# EAGLE board electrosteel2020_9 (EAGLE 9.2.2), part 1 of 4
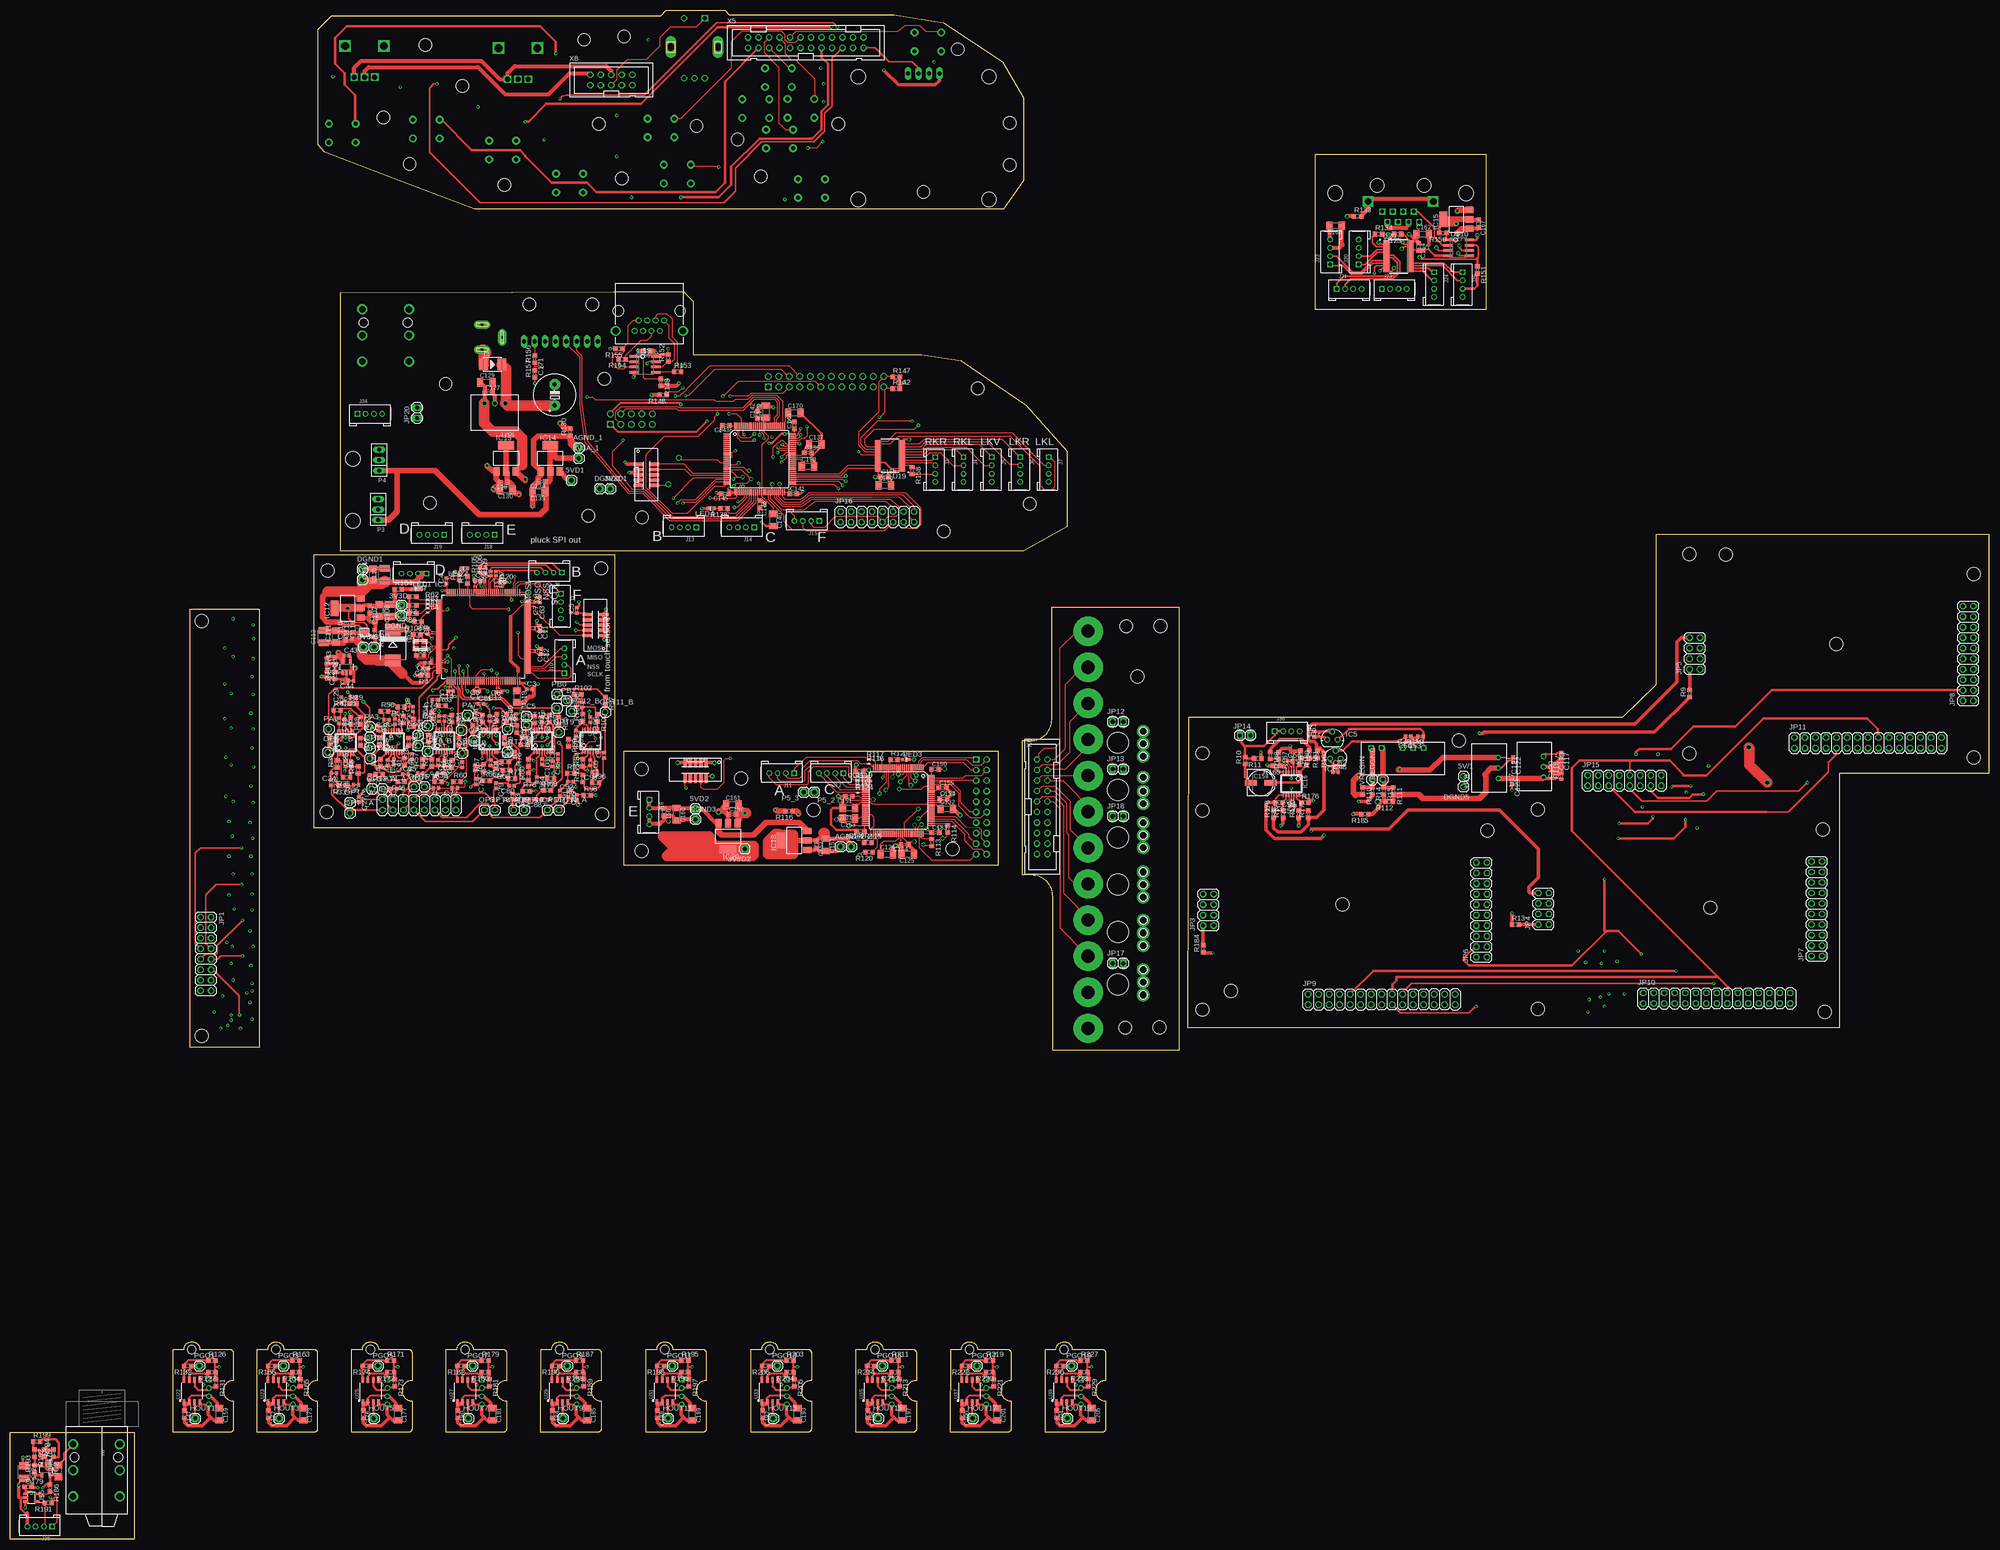
[diagram p0: board, top side]
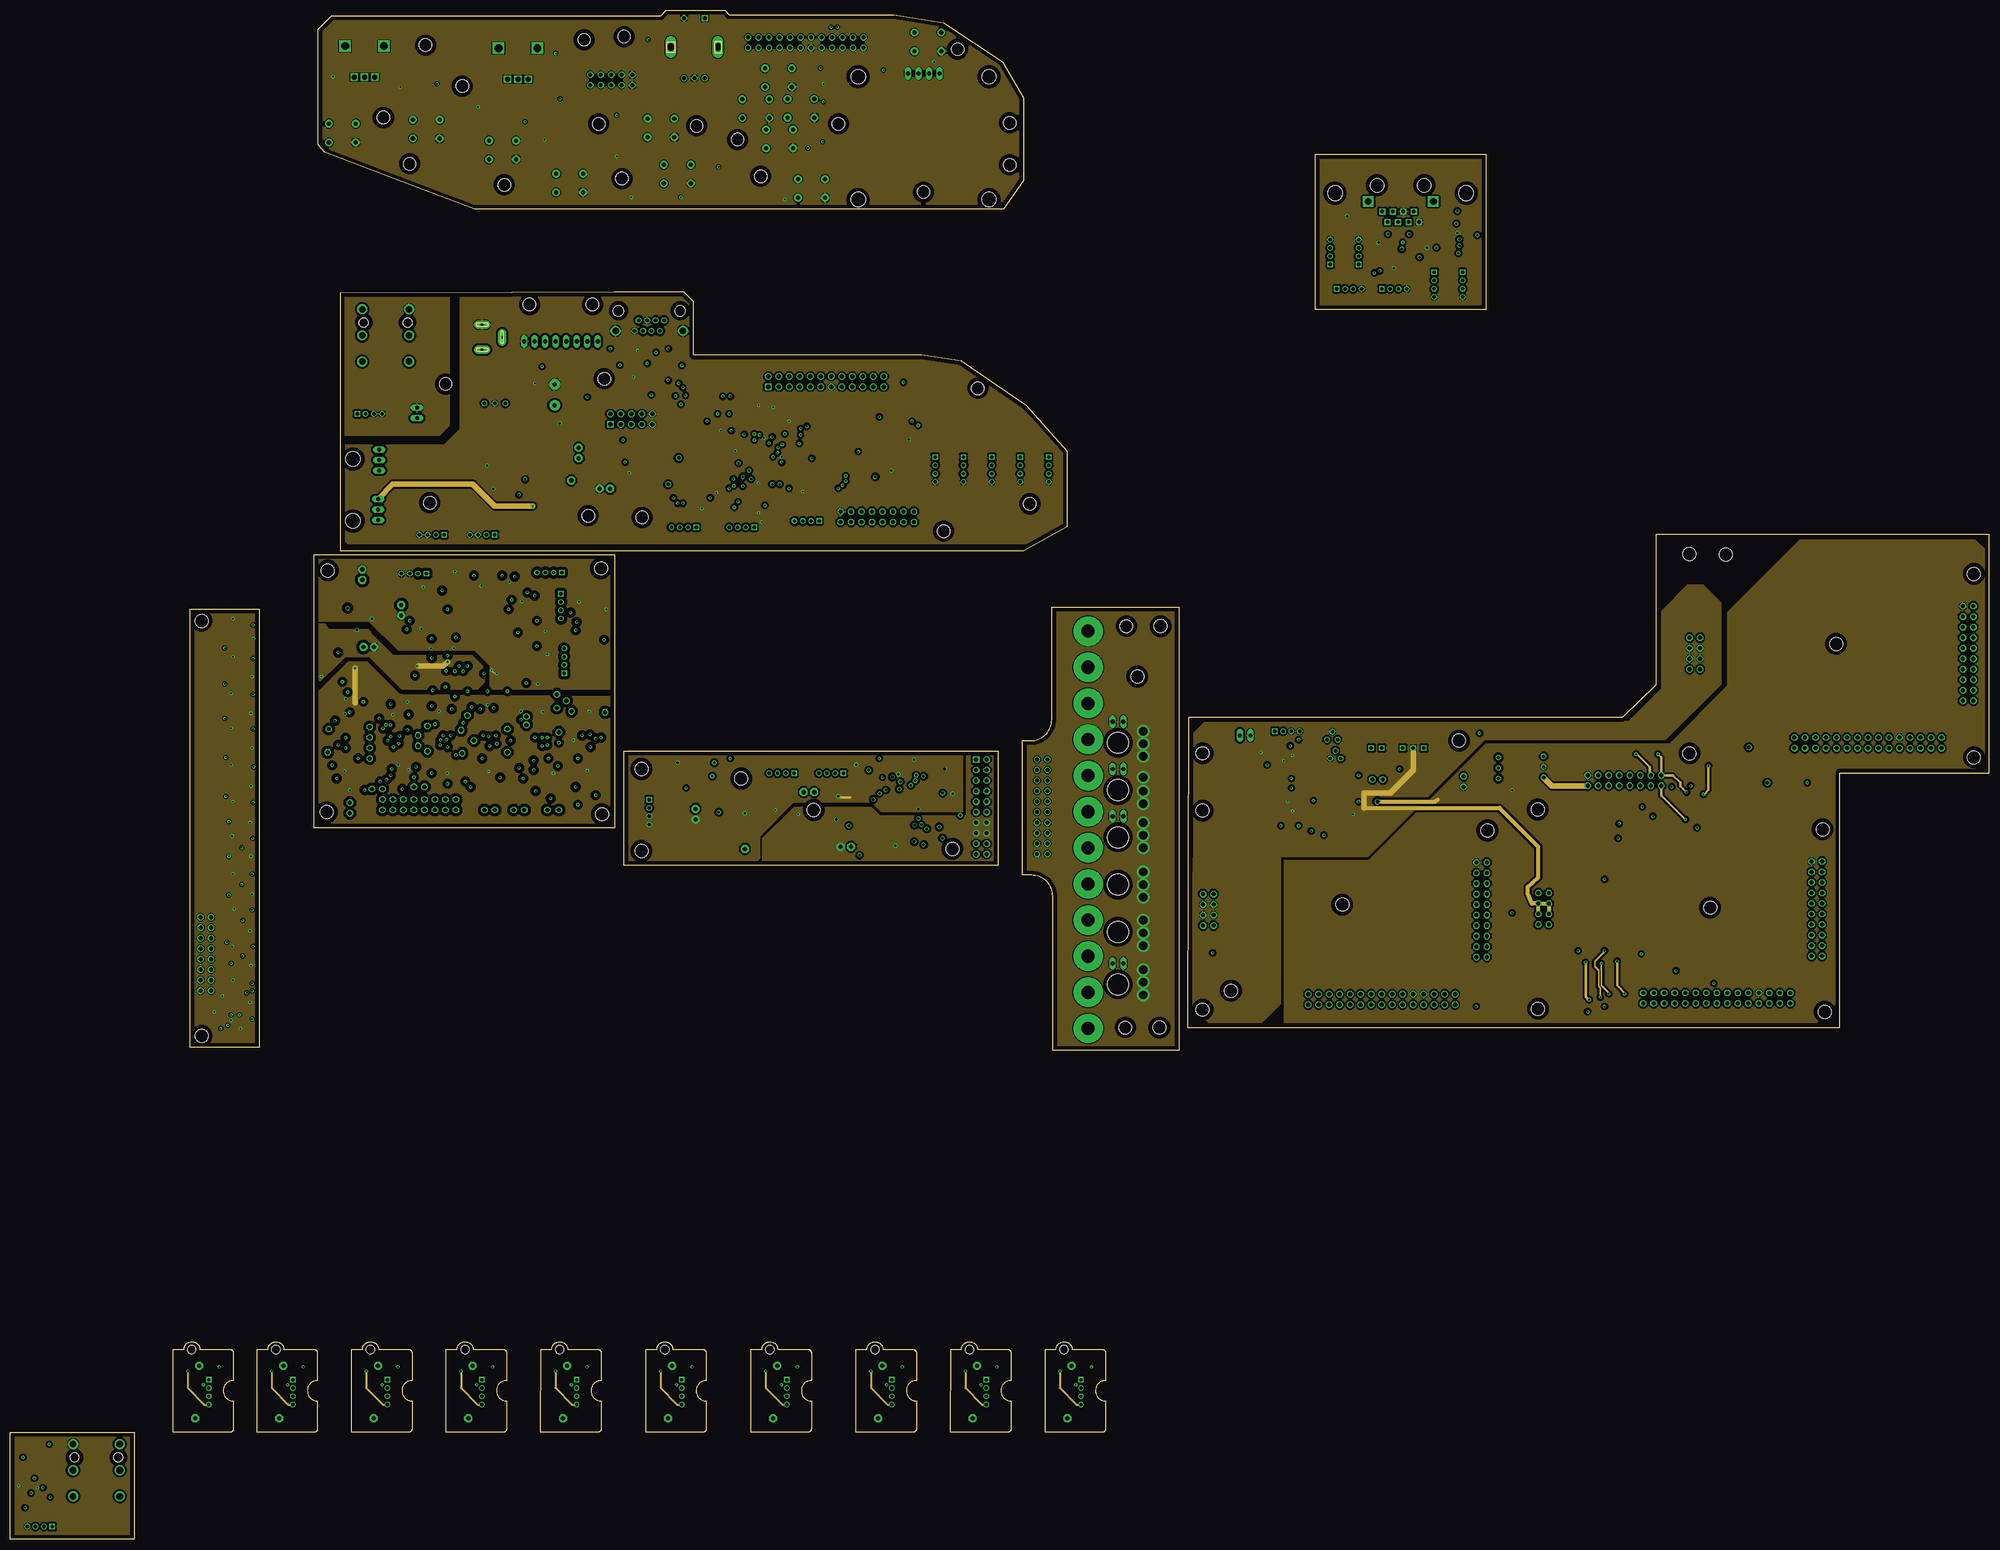
[diagram p1: board, inner layer Route2]
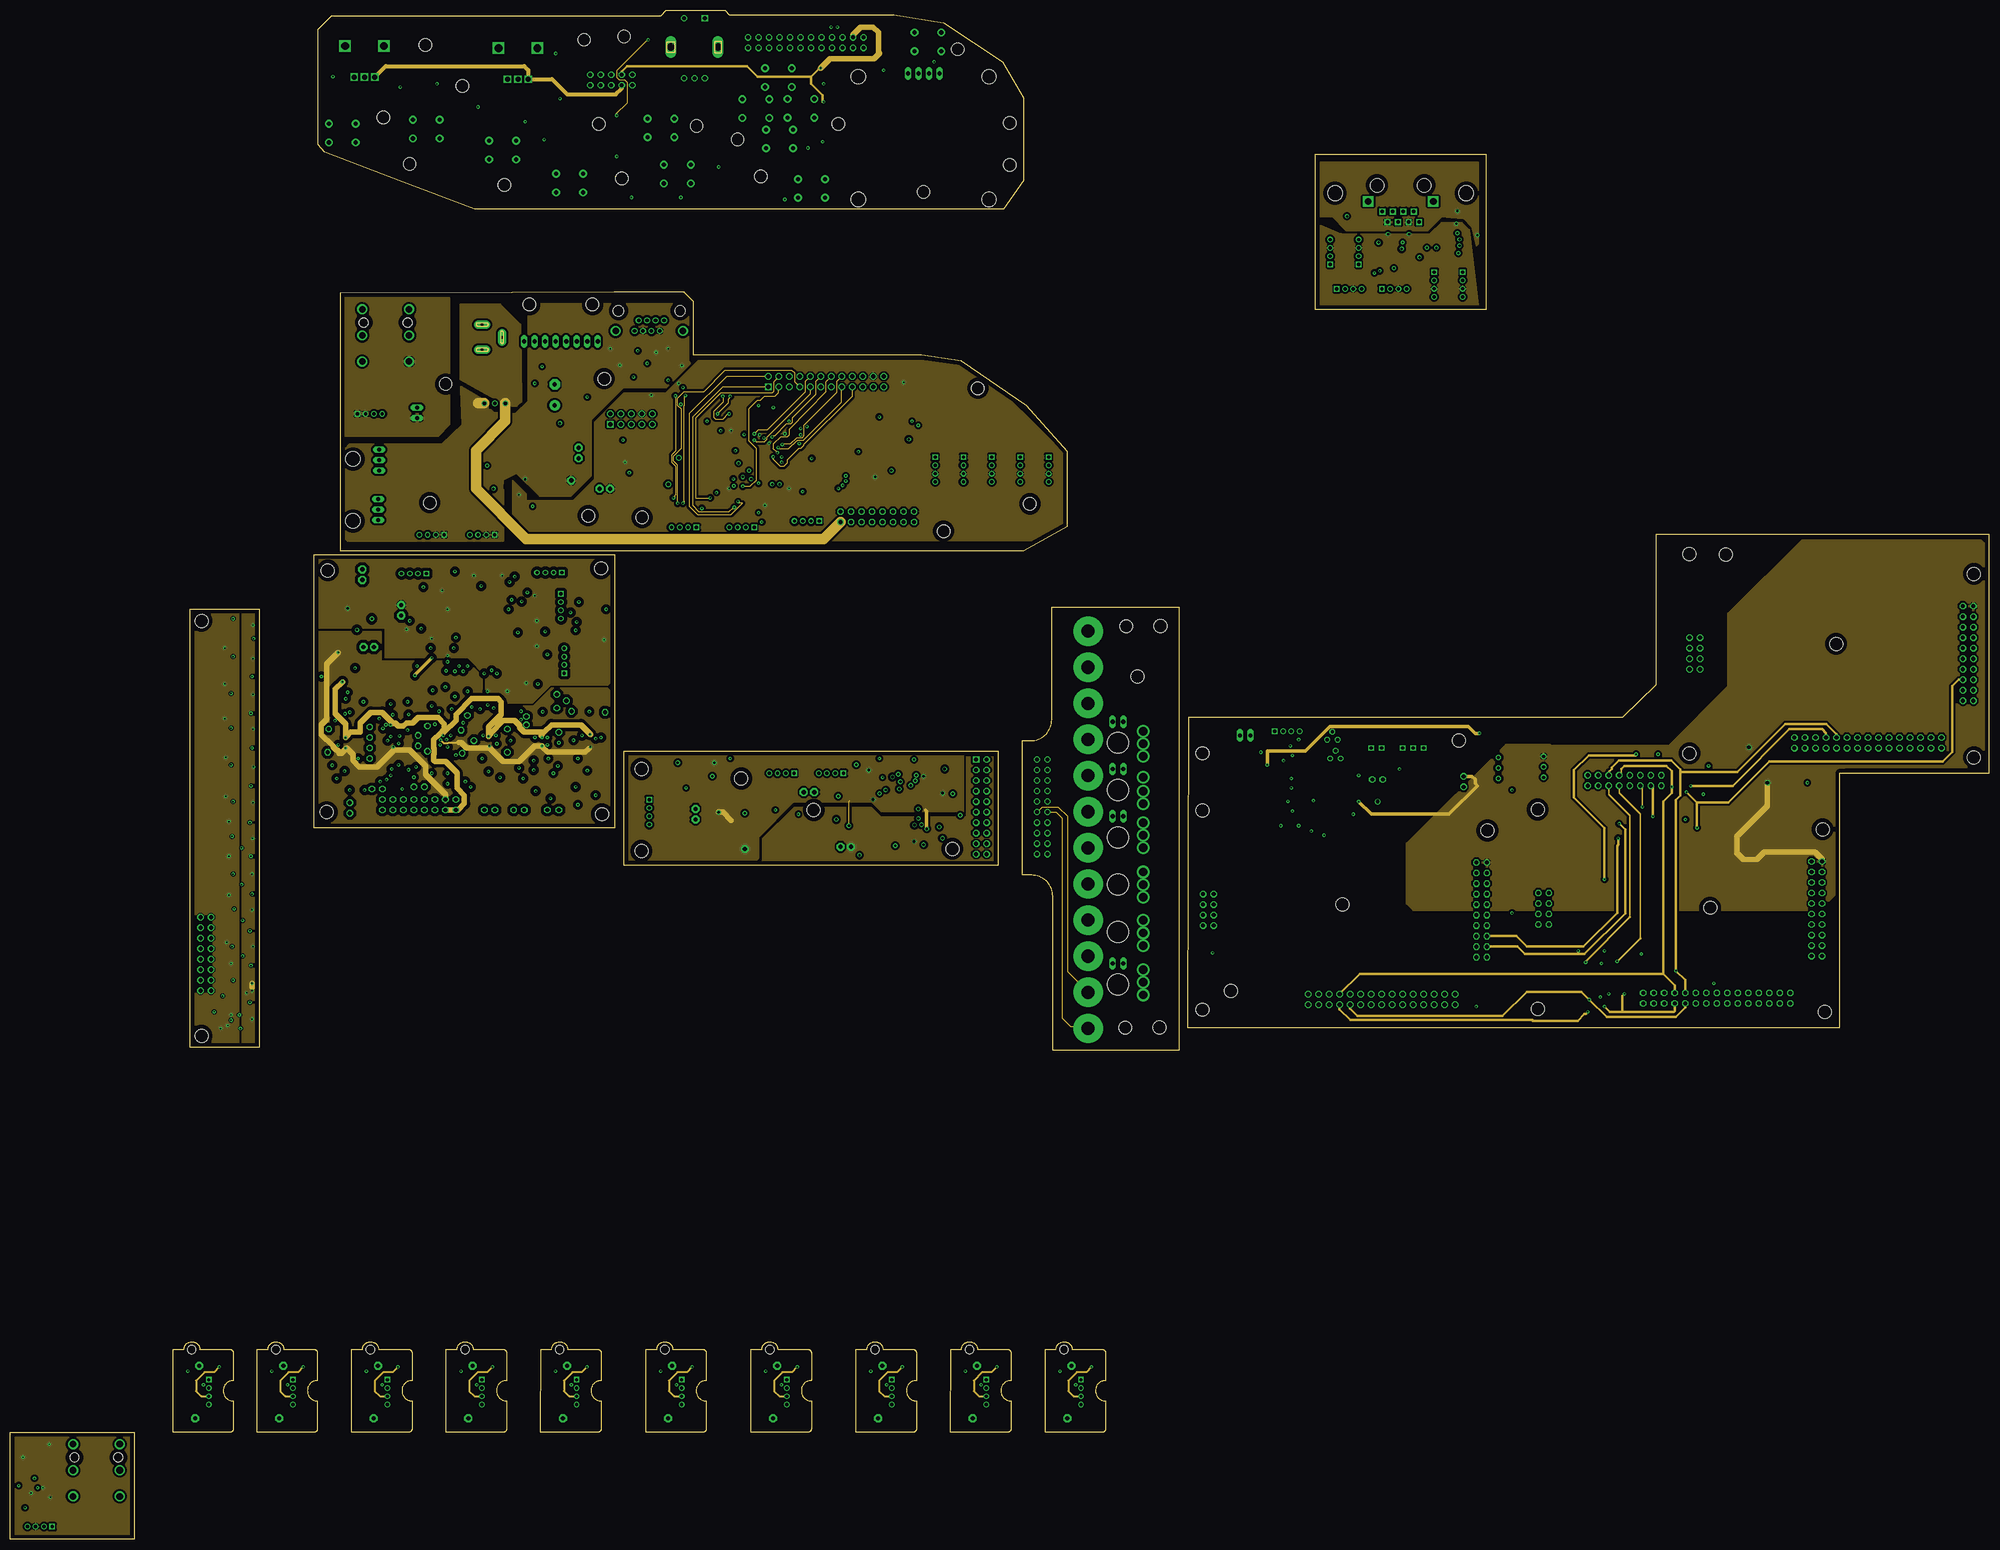
[diagram p2: board, inner layer Route15]
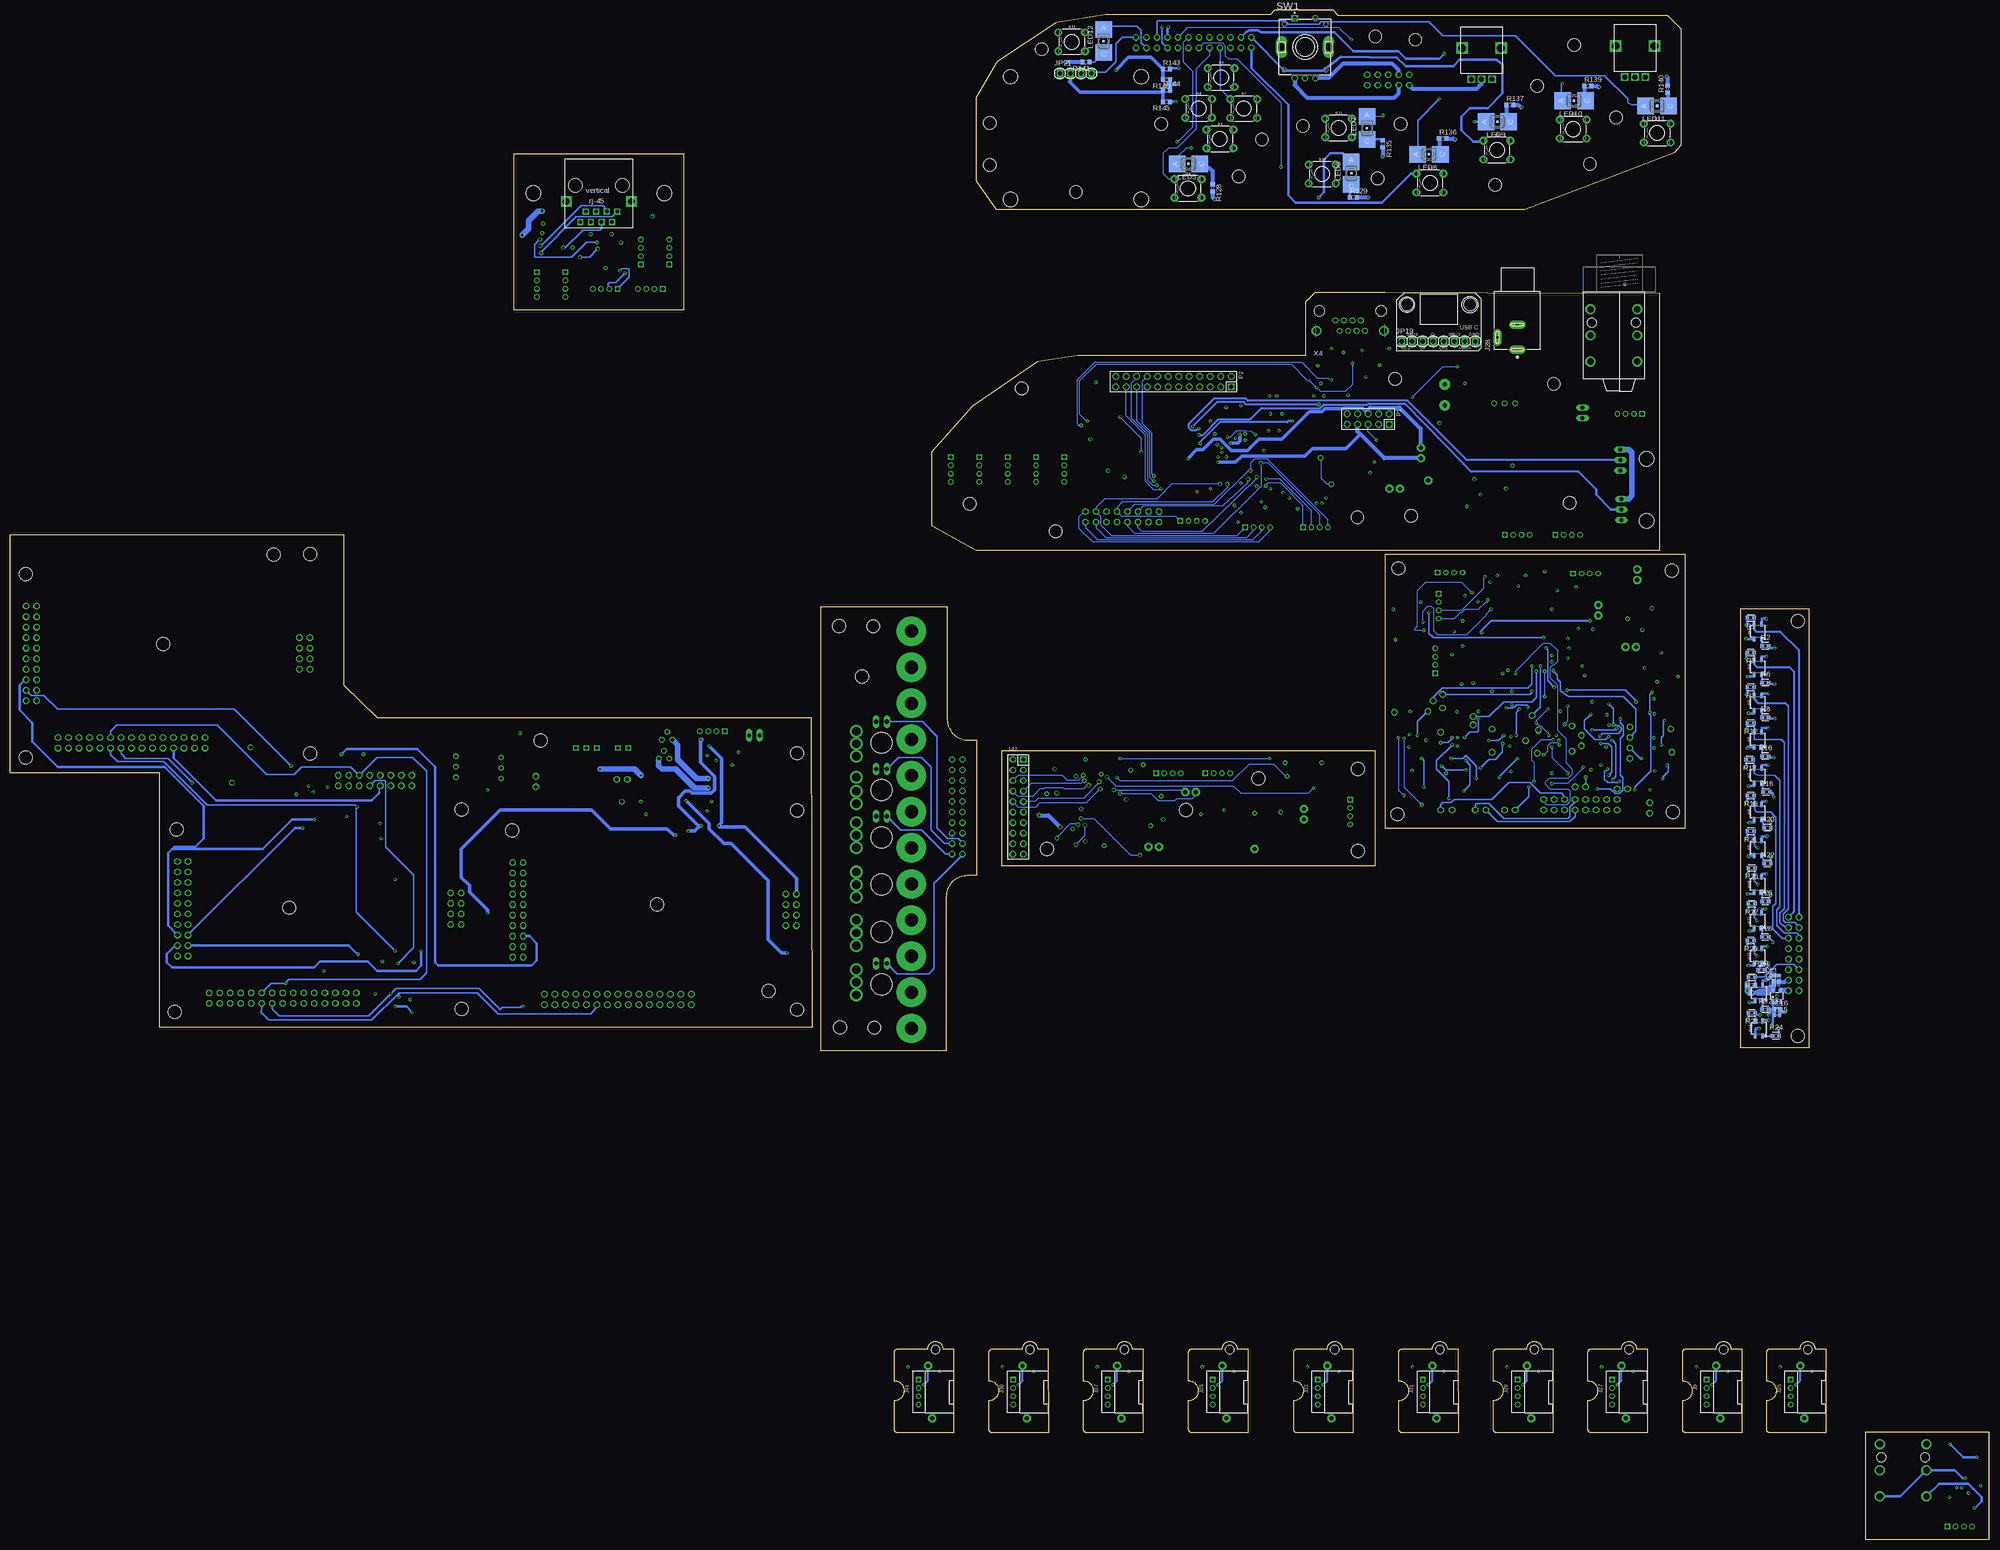
[diagram p3: board, bottom side, seen from below]

Size 478.28 x 369.57 mm. Coordinates in mm from the lower left corner, seen from the top.
Outline: 216 segments
Copper layers (1+2*15+16): Top 0.035mm / dielectric 0.5mm / Route2 0.035mm / dielectric 0.5mm / Route15 0.035mm / dielectric 0.5mm / Bottom 0.035mm
Design rules "default *": minimum track width 6mil, minimum drill 0.35mm, track to track 9mil, track to pad 9mil, pad to pad 9mil, via to via 9mil, smd to smd 9mil, copper to edge 40mil, drill to drill 6mil, minimum pad ring 10mil, minimum via ring 8mil, stop-mask expansion 4mil, vias tented up to drill 0mil, thermal gap 10mil
Holes 3.17 mm at 288.16,176.15 357,171.32 288.16,128.02 369.19,176.4 438.02,171.58 369.24,128.24 405.76,238.15 474.57,233.32 405.84,189.97 277.75,123.7 152.53,186.18 272.41,208.53 76.45,175.77 76.71,234.19 142.75,234.7 143,175.26 321.94,153.42 410.85,152.65 441.33,216.41 350.14,193.04 288.16,189.99 474.6,188.98 414.65,238 295.02,132.59 438.53,127.51 278,220.73 194.18,176.28 227.71,166.88 176.66,183.9 152.53,166.37 46.23,222 46.23,121.67
Holes 5.08 mm at 267.72,192.53 267.72,181.1 267.72,169.67 267.72,158.24 267.72,146.81 267.72,134.11
Holes 2.03 mm at 43.87,45.87 64.19,45.87 87.05,45.87 109.91,45.87 132.77,45.87 158.17,45.87 183.57,45.87 208.97,45.87 231.83,45.87 254.69,45.87
Holes 3.56 mm at 320.17,325.37 351.92,325.37 82.8,261.11 82.8,246.13
Holes 3.05 mm at 125.48,298.45 140.72,298.45 228.98,360.17 241.55,342.39 200.15,342.14 220.73,325.63 147.83,328.93 96.52,332.49 138.68,362.46 100.33,361.19 105.2,279.25 143.56,280.51 101.39,250.54 152.7,246.98 225.59,243.69 233.86,278.22 241.55,332.23 246.43,250.28 119.38,327.41 109.22,351.28 90.17,343.66 142.24,342.14 165.86,341.63 181.36,329.44 175.77,338.33 148.34,363.22 139.7,247.4 269.49,123.7 269.75,220.73
Holes 3.5 mm at 204.93,353.53 236.53,353.53 204.93,323.83 236.53,323.83

## Footprints (pad centres in the part's own frame; a part is rotated, then mirrored left to right if it is on the bottom)
1X01 = drill 1.016 pad 1.93 octagon: 1 0,0
1X01' = drill 1.016 octagon: 1 0,0
C0402 = smd 0.7 x 0.9: 1 -0.65,0; 2 0.65,0
C0201 = smd 0.25 x 0.35: 1 -0.25,0; 2 0.25,0
C0603 = smd 1.1 x 1: 1 -0.85,0; 2 0.85,0
C1206 = smd 1.6 x 1.8: 1 -1.4,0; 2 1.4,0
SMC_B = smd 1.6 x 2.4: + -1.5,0; - 1.5,0
C0603K = smd 1.05 x 1.08: 1 -0.875,0; 2 0.875,0
C1206K = smd 1.5 x 2: 1 -1.5,0; 2 1.5,0
PANASONIC_D = smd 3 x 1.4: + 2.4,0; - -2.4,0
E5-10,5 = drill 1.016 pad 2.54: + -2.54,0 | drill 1.016 pad 2.54 octagon: - 2.54,0
DO-214AA = smd 2.159 x 2.743: + -2.21,0; - 2.21,0
SMC = smd 2.8 x 3.8: A 3.7,0; C -3.7,0
TSSOP14 = smd 0.305 x 0.991: 1 -1.905,-2.718; 2 -1.27,-2.718; 3 -0.635,-2.718; 4 0,-2.718; 5 0.635,-2.718; 6 1.27,-2.718; 7 1.905,-2.718; 8 1.905,2.718; 9 1.27,2.718; 10 0.635,2.718; 11 0,2.718; 12 -0.635,2.718; 13 -1.27,2.718; 14 -1.905,2.718
SOT23-5 = smd 0.6 x 1.2: 1 -0.95,-1.306; 2 0,-1.306; 3 0.95,-1.306; 4 0.95,1.306; 5 -0.95,1.306
QFP50P2200X2200X160-144N = smd 1.56 x 0.28: 1 -10.68,8.75; 2 -10.68,8.25; 3 -10.68,7.75; 4 -10.68,7.25; 5 -10.68,6.75; 6 -10.68,6.25; 7 -10.68,5.75; 8 -10.68,5.25; 9 -10.68,4.75; 10 -10.68,4.25; 11 -10.68,3.75; 12 -10.68,3.25; 13 -10.68,2.75; 14 -10.68,2.25; 15 -10.68,1.75; 16 -10.68,1.25; 17 -10.68,0.75; 18 -10.68,0.25; 19 -10.68,-0.25; 20 -10.68,-0.75; 21 -10.68,-1.25; 22 -10.68,-1.75; 23 -10.68,-2.25; 24 -10.68,-2.75; 25 -10.68,-3.25; 26 -10.68,-3.75; 27 -10.68,-4.25; 28 -10.68,-4.75; 29 -10.68,-5.25; 30 -10.68,-5.75; 31 -10.68,-6.25; 32 -10.68,-6.75; 33 -10.68,-7.25; 34 -10.68,-7.75; 35 -10.68,-8.25; 36 -10.68,-8.75; 73 10.68,-8.75; 74 10.68,-8.25; 75 10.68,-7.75; 76 10.68,-7.25; 77 10.68,-6.75; 78 10.68,-6.25; 79 10.68,-5.75; 80 10.68,-5.25; 81 10.68,-4.75; 82 10.68,-4.25; 83 10.68,-3.75; 84 10.68,-3.25; 85 10.68,-2.75; 86 10.68,-2.25; 87 10.68,-1.75; 88 10.68,-1.25; 89 10.68,-0.75; 90 10.68,-0.25; 91 10.68,0.25; 92 10.68,0.75; 93 10.68,1.25; 94 10.68,1.75; 95 10.68,2.25; 96 10.68,2.75; 97 10.68,3.25; 98 10.68,3.75; 99 10.68,4.25; 100 10.68,4.75; 101 10.68,5.25; 102 10.68,5.75; 103 10.68,6.25; 104 10.68,6.75; 105 10.68,7.25; 106 10.68,7.75; 107 10.68,8.25; 108 10.68,8.75 | smd 0.28 x 1.56: 37 -8.75,-10.68; 38 -8.25,-10.68; 39 -7.75,-10.68; 40 -7.25,-10.68; 41 -6.75,-10.68; 42 -6.25,-10.68; 43 -5.75,-10.68; 44 -5.25,-10.68; 45 -4.75,-10.68; 46 -4.25,-10.68; 47 -3.75,-10.68; 48 -3.25,-10.68; 49 -2.75,-10.68; 50 -2.25,-10.68; 51 -1.75,-10.68; 52 -1.25,-10.68; 53 -0.75,-10.68; 54 -0.25,-10.68; 55 0.25,-10.68; 56 0.75,-10.68; 57 1.25,-10.68; 58 1.75,-10.68; 59 2.25,-10.68; 60 2.75,-10.68; 61 3.25,-10.68; 62 3.75,-10.68; 63 4.25,-10.68; 64 4.75,-10.68; 65 5.25,-10.68; 66 5.75,-10.68; 67 6.25,-10.68; 68 6.75,-10.68; 69 7.25,-10.68; 70 7.75,-10.68; 71 8.25,-10.68; 72 8.75,-10.68; 109 8.75,10.68; 110 8.25,10.68; 111 7.75,10.68; 112 7.25,10.68; 113 6.75,10.68; 114 6.25,10.68; 115 5.75,10.68; 116 5.25,10.68; 117 4.75,10.68; 118 4.25,10.68; 119 3.75,10.68; 120 3.25,10.68; 121 2.75,10.68; 122 2.25,10.68; 123 1.75,10.68; 124 1.25,10.68; 125 0.75,10.68; 126 0.25,10.68; 127 -0.25,10.68; 128 -0.75,10.68; 129 -1.25,10.68; 130 -1.75,10.68; 131 -2.25,10.68; 132 -2.75,10.68; 133 -3.25,10.68; 134 -3.75,10.68; 135 -4.25,10.68; 136 -4.75,10.68; 137 -5.25,10.68; 138 -5.75,10.68; 139 -6.25,10.68; 140 -6.75,10.68; 141 -7.25,10.68; 142 -7.75,10.68; 143 -8.25,10.68; 144 -8.75,10.68
78LXX = drill 0.813 octagon: GND 0,1.905; IN 1.27,0; OUT -1.27,0
79LXX = drill 0.813 octagon: GND -1.27,0; IN 0,1.905; OUT 1.27,0
6-WSON = smd 0.45 x 0.3: 1 -0.975,0.65; 2 -0.975,0; 3 -0.975,-0.65; 4 0.975,-0.65; 5 0.975,0; 6 0.975,0.65 | smd 0.9 x 1.6: PAD 0,0
SOT223 = smd 1.499 x 2.007: 1 -2.261,-3.15; 2 0.025,-3.15; 3 2.311,-3.15 | smd 3.81 x 2.007: PAD 0,3.15
AUDIO_JACK_0.25"_TRS_PTH_RA = drill 1.6: RING 10.5,-6.95; RING-NORM 10.5,4.35; SLEEVE 4.2,-6.95; SLEEVE-NORM 4.2,4.35; TIP 16.8,-6.95; TIP-NORM 16.8,4.35 | hole 2.2: 7.4,4; 7.4,-6.6
HW4-2.0 = drill 0.8 pad 1.27 square: 1 -3,0 | drill 0.8 pad 1.27: 2 -1,0; 3 1,0; 4 3,0
HW4-2.0-90D = drill 0.8 pad 1.27 square: 1 -3,0 | drill 0.8 pad 1.27: 2 -1,0; 3 1,0; 4 3,0
CUI_PJ-066A = drill 0.7 pad 2 long: 1 0,0; 2 6.1,0; 3 3,4.8
DIL-100-2X10_M = drill 1.016 square: 1 -11.43,1.27 | drill 1.016 octagon: 2 -11.43,-1.27; 3 -8.89,1.27; 4 -8.89,-1.27; 5 -6.35,1.27; 6 -6.35,-1.27; 7 -3.81,1.27; 8 -3.81,-1.27; 9 -1.27,1.27; 10 -1.27,-1.27; 11 1.27,1.27; 12 1.27,-1.27; 13 3.81,1.27; 14 3.81,-1.27; 15 6.35,1.27; 16 6.35,-1.27; 17 8.89,1.27; 18 8.89,-1.27; 19 11.43,1.27; 20 11.43,-1.27
2X08 = drill 1.016 octagon: 1 -8.89,-1.27; 2 -8.89,1.27; 3 -6.35,-1.27; 4 -6.35,1.27; 5 -3.81,-1.27; 6 -3.81,1.27; 7 -1.27,-1.27; 8 -1.27,1.27; 9 1.27,-1.27; 10 1.27,1.27; 11 3.81,-1.27; 12 3.81,1.27; 13 6.35,-1.27; 14 6.35,1.27; 15 8.89,-1.27; 16 8.89,1.27
2X04 = drill 1.016 octagon: 1 -3.81,-1.27; 2 -3.81,1.27; 3 -1.27,-1.27; 4 -1.27,1.27; 5 1.27,-1.27; 6 1.27,1.27; 7 3.81,-1.27; 8 3.81,1.27
2X10 = drill 1.016 octagon: 1 -11.43,-1.27; 2 -11.43,1.27; 3 -8.89,-1.27; 4 -8.89,1.27; 5 -6.35,-1.27; 6 -6.35,1.27; 7 -3.81,-1.27; 8 -3.81,1.27; 9 -1.27,-1.27; 10 -1.27,1.27; 11 1.27,-1.27; 12 1.27,1.27; 13 3.81,-1.27; 14 3.81,1.27; 15 6.35,-1.27; 16 6.35,1.27; 17 8.89,-1.27; 18 8.89,1.27; 19 11.43,-1.27; 20 11.43,1.27
2X15 = drill 1.016 octagon: 1 -17.78,-1.27; 2 -17.78,1.27; 3 -15.24,-1.27; 4 -15.24,1.27; 5 -12.7,-1.27; 6 -12.7,1.27; 7 -10.16,-1.27; 8 -10.16,1.27; 9 -7.62,-1.27; 10 -7.62,1.27; 11 -5.08,-1.27; 12 -5.08,1.27; 13 -2.54,-1.27; 14 -2.54,1.27; 15 0,-1.27; 16 0,1.27; 17 2.54,-1.27; 18 2.54,1.27; 19 5.08,-1.27; 20 5.08,1.27; 21 7.62,-1.27; 22 7.62,1.27; 23 10.16,-1.27; 24 10.16,1.27; 25 12.7,-1.27; 26 12.7,1.27; 27 15.24,-1.27; 28 15.24,1.27; 29 17.78,-1.27; 30 17.78,1.27
1X02 = drill 1.016 long: 1 -1.27,0; 2 1.27,0
1X08 = drill 1.016 long: 1 -8.89,0; 2 -6.35,0; 3 -3.81,0; 4 -1.27,0; 5 1.27,0; 6 3.81,0; 7 6.35,0; 8 8.89,0
1X04 = drill 1.016 long: 1 -3.81,0; 2 -1.27,0; 3 1.27,0; 4 3.81,0
CHIP-LED0603 = smd 0.8 x 0.8: A 0,-0.75; C 0,0.75
P-LCC-2 = smd 4 x 4: A 0,2.75; C 0,-2.75
DIL-100-2X05_M = drill 1.016 square: 1 -5.08,1.27 | drill 1.016 octagon: 2 -5.08,-1.27; 3 -2.54,1.27; 4 -2.54,-1.27; 5 0,1.27; 6 0,-1.27; 7 2.54,1.27; 8 2.54,-1.27; 9 5.08,1.27; 10 5.08,-1.27
DIL-100-2X12_M = drill 1.016 square: 1 -13.97,1.27 | drill 1.016 octagon: 2 -13.97,-1.27; 3 -11.43,1.27; 4 -11.43,-1.27; 5 -8.89,1.27; 6 -8.89,-1.27; 7 -6.35,1.27; 8 -6.35,-1.27; 9 -3.81,1.27; 10 -3.81,-1.27; 11 -1.27,1.27; 12 -1.27,-1.27; 13 1.27,1.27; 14 1.27,-1.27; 15 3.81,1.27; 16 3.81,-1.27; 17 6.35,1.27; 18 6.35,-1.27; 19 8.89,1.27; 20 8.89,-1.27; 21 11.43,1.27; 22 11.43,-1.27; 23 13.97,1.27; 24 13.97,-1.27
SIP-100-03-40Y = drill 1.016 long: 1 -2.54,0; 2 0,0; 3 2.54,0
NX3225 = smd 1.4 x 1.2: 1 -1.1,-0.8; 2 1.1,-0.8; 3 1.1,0.8; 4 -1.1,0.8
RESC1608X60 = smd 0.799 x 0.974: 1 -0.815,0; 2 0.815,0
R0603 = smd 1 x 1.1: 1 -0.85,0; 2 0.85,0
R0402 = smd 0.7 x 0.9: 1 -0.55,0; 2 0.55,0
R0201 = smd 0.28 x 0.43: 1 -0.255,0; 2 0.255,0
TACTILE_SWITCH_PTH_6.0MM = drill 1.016 pad 1.88: 1 -3.251,2.261; 2 3.251,2.261; 3 -3.251,-2.261; 4 3.251,-2.261
PEC11R-4215F-S0024 = drill 1 square: 1 -2.5,7 | drill 1: 2 2.5,7; A -2.5,-7.5; B 2.5,-7.5; C 0,-7.5 | drill 1.8 long: P1 -5.7,0; P2 5.7,0
TQFP-100-14X14MM = smd 1.5 x 0.27: 1 -8,6; 2 -8,5.5; 3 -8,5; 4 -8,4.5; 5 -8,4; 6 -8,3.5; 7 -8,3; 8 -8,2.5; 9 -8,2; 10 -8,1.5; 11 -8,1; 12 -8,0.5; 13 -8,0; 14 -8,-0.5; 15 -8,-1; 16 -8,-1.5; 17 -8,-2; 18 -8,-2.5; 19 -8,-3; 20 -8,-3.5; 21 -8,-4; 22 -8,-4.5; 23 -8,-5; 24 -8,-5.5; 25 -8,-6; 51 8,-6; 52 8,-5.5; 53 8,-5; 54 8,-4.5; 55 8,-4; 56 8,-3.5; 57 8,-3; 58 8,-2.5; 59 8,-2; 60 8,-1.5; 61 8,-1; 62 8,-0.5; 63 8,0; 64 8,0.5; 65 8,1; 66 8,1.5; 67 8,2; 68 8,2.5; 69 8,3; 70 8,3.5; 71 8,4; 72 8,4.5; 73 8,5; 74 8,5.5; 75 8,6 | smd 0.27 x 1.5: 26 -6,-8; 27 -5.5,-8; 28 -5,-8; 29 -4.5,-8; 30 -4,-8; 31 -3.5,-8; 32 -3,-8; 33 -2.5,-8; 34 -2,-8; 35 -1.5,-8; 36 -1,-8; 37 -0.5,-8; 38 0,-8; 39 0.5,-8; 40 1,-8; 41 1.5,-8; 42 2,-8; 43 2.5,-8; 44 3,-8; 45 3.5,-8; 46 4,-8; 47 4.5,-8; 48 5,-8; 49 5.5,-8; 50 6,-8; 76 6,8; 77 5.5,8; 78 5,8; 79 4.5,8; 80 4,8; 81 3.5,8; 82 3,8; 83 2.5,8; 84 2,8; 85 1.5,8; 86 1,8; 87 0.5,8; 88 0,8; 89 -0.5,8; 90 -1,8; 91 -1.5,8; 92 -2,8; 93 -2.5,8; 94 -3,8; 95 -3.5,8; 96 -4,8; 97 -4.5,8; 98 -5,8; 99 -5.5,8; 100 -6,8
QRE1113 = smd 1.2 x 0.6: 1 -1.8,-0.9; 2 1.8,-0.9; 3 1.8,0.9; 4 -1.8,0.9
DC-DC_CONVERTER_78XX = drill 0.8: GND 0,0; VIN -2.54,0; VOUT 2.54,0
TEXAS_SOT23-5 = smd 0.55 x 1.2: 1 -0.95,-1.3; 2 0,-1.3; 3 0.95,-1.3; 4 0.95,1.3; 5 -0.95,1.3
SOP65P640X120-24N = smd 1.57 x 0.41: 1 -2.87,3.575; 2 -2.87,2.925; 3 -2.87,2.275; 4 -2.87,1.625; 5 -2.87,0.975; 6 -2.87,0.325; 7 -2.87,-0.325; 8 -2.87,-0.975; 9 -2.87,-1.625; 10 -2.87,-2.275; 11 -2.87,-2.925; 12 -2.87,-3.575; 13 2.87,-3.575; 14 2.87,-2.925; 15 2.87,-2.275; 16 2.87,-1.625; 17 2.87,-0.975; 18 2.87,-0.325; 19 2.87,0.325; 20 2.87,0.975; 21 2.87,1.625; 22 2.87,2.275; 23 2.87,2.925; 24 2.87,3.575
SOIC8-1.27-5X4MM = smd 0.6 x 1.4: 1 -1.905,-2.7; 2 -0.635,-2.7; 3 0.635,-2.7; 4 1.905,-2.7; 5 1.905,2.7; 6 0.635,2.7; 7 -0.635,2.7; 8 -1.905,2.7
RK09 = drill 1.2 square: 1-09 -2.5,-7.5; 2-09 0,-7.5; 3-09 2.5,-7.5 | drill 1.854 square: MOUNT1 -4.683,0; MOUNT2 4.683,0
CMR0512S3C = drill 0.8 square: P$1 -7.62,0; P$2 -5.08,0; P$3 0,0; P$4 2.54,0; P$5 5.08,0
SOT23-5L = smd 0.55 x 1.2: 1 -0.95,-1.3; 2 0,-1.3; 3 0.95,-1.3; 4 0.95,1.3; 5 -0.95,1.3
SS-7188VS-A-FLS_RJ45 = drill 0.889 square: P$1 -4.445,4.445; P$2 -3.175,6.985; P$3 -1.905,4.445; P$4 -0.635,6.985; P$5 0.635,4.445; P$6 1.905,6.985; P$7 3.175,4.445; P$8 4.445,6.985 | drill 1.651 square: P$9 -7.874,1.981; P$10 7.874,1.981 | hole 3.277: -5.715,-1.905; 5.715,-1.905
SO8 = smd 0.6 x 2.2: 1 -1.905,-2.6; 2 -0.635,-2.6; 3 0.635,-2.6; 4 1.905,-2.6; 5 1.905,2.6; 6 0.635,2.6; 7 -0.635,2.6; 8 -1.905,2.6
3221-10-0300-00 = smd 0.76 x 2.4: 1 -2.54,-1.87; 2 -2.54,1.97; 3 -1.27,-1.87; 4 -1.27,1.97; 5 0,-1.87; 6 0,1.97; 7 1.27,-1.87; 8 1.27,1.97; 9 2.54,-1.87; 10 2.54,1.97
GLX-S-88M = drill 0.9 pad 1.422: 1 -3.57,-2.3; 2 -2.55,-4.84; 3 -1.53,-2.3; 4 -0.51,-4.84; 5 0.51,-2.3; 6 1.53,-4.84; 7 2.55,-2.3; 8 3.57,-4.84 | drill 1.6 pad 2.184: S1 -8.125,-4.84; S2 8.125,-4.84 | hole 2.55: -7.44,0; 7.44,0
PAK100/2500-24 = drill 1 pad 1.422: 1 -13.97,-1.27; 2 -13.97,1.27; 3 -11.43,-1.27; 4 -11.43,1.27; 5 -8.89,-1.27; 6 -8.89,1.27; 7 -6.35,-1.27; 8 -6.35,1.27; 9 -3.81,-1.27; 10 -3.81,1.27; 11 -1.27,-1.27; 12 -1.27,1.27; 13 1.27,-1.27; 14 1.27,1.27; 15 3.81,-1.27; 16 3.81,1.27; 17 6.35,-1.27; 18 6.35,1.27; 19 8.89,-1.27; 20 8.89,1.27; 21 11.43,-1.27; 22 11.43,1.27; 23 13.97,-1.27; 24 13.97,1.27
PAK100/2500-20 = drill 1 pad 1.422: 1 -11.43,-1.27; 2 -11.43,1.27; 3 -8.89,-1.27; 4 -8.89,1.27; 5 -6.35,-1.27; 6 -6.35,1.27; 7 -3.81,-1.27; 8 -3.81,1.27; 9 -1.27,-1.27; 10 -1.27,1.27; 11 1.27,-1.27; 12 1.27,1.27; 13 3.81,-1.27; 14 3.81,1.27; 15 6.35,-1.27; 16 6.35,1.27; 17 8.89,-1.27; 18 8.89,1.27; 19 11.43,-1.27; 20 11.43,1.27
PAK100/2500-10 = drill 1 pad 1.422: 1 -5.08,-1.27; 2 -5.08,1.27; 3 -2.54,-1.27; 4 -2.54,1.27; 5 0,-1.27; 6 0,1.27; 7 2.54,-1.27; 8 2.54,1.27; 9 5.08,-1.27; 10 5.08,1.27

## Placement (x,y rotation side)
3V3A  [1X01]  85.34,215.65 0 top
3V3A_1  [1X01]  137.35,261.29 0 top
3V3A_2  [1X01]  203.2,167.39 0 top
3V3D  [1X01]  94.49,225.81 0 top
3V3D1  [1X01]  144.97,253.92 0 top
3V3D2  [1X01]  177.55,166.88 180 top
5V  [1X01]  85.09,231.9 0 top
5V/1  PINHD-1X1  [1X01']  351.28,184.4 0 top
5VD1  [1X01]  135.58,255.96 0 top
5VD2  [1X01]  165.61,176.53 0 top
AGND  [1X01]  87.88,215.65 0 top
AGND_1  [1X01]  137.35,263.83 0 top
AGND_2  [1X01]  200.66,167.39 0 top
C1  .1uf  [C0402]  112.78,204.98 180 top
C2  .1uf  [C0402]  100.84,219.46 90 top
C3  .1uf  [C0402]  125.48,205.49 0 top
C4  .1uf  [C0402]  105.41,231.65 90 top
C5  .1uf  [C0402]  136.91,224.54 90 top
C6  .01uf  [C0201]  117.81,205.87 180 top
C7  .01uf  [C0201]  126.49,226.57 270 top
C8  .01uf  [C0201]  112.78,205.99 180 top
C9  .01uf  [C0201]  101.85,219.2 90 top
C10  .01uf  [C0201]  106.3,206.02 180 top
C11  .1uf  [C0402]  128.02,220.22 270 top
C12  .1uf  [C0402]  128.27,214.63 270 top
C13  .1uf  [C0402]  118.11,204.72 180 top
C14  .1uf  [C0402]  106.43,204.98 180 top
C15  .1uf  [C0402]  51.31,126.75 0 bottom
C16  .01uf  [C0402]  51.31,128.27 0 bottom
C17  18pf  [C0603]  98.3,218.69 180 top
C18  18pf  [C0603]  99.06,213.61 0 top
C19  2.2uf  [C1206]  122.43,203.71 270 top
C20  .1uf  [C0402]  118.87,231.39 0 top
C21  .01uf  [C0402]  50.8,135.64 90 bottom
C22  .1uf  [C0402]  52.07,135.64 90 bottom
C23  .1uf  [C0402]  77.47,182.88 270 top
C24  .1uf  [C0402]  78.23,185.17 180 top
C25  .1uf  [C0402]  82.3,187.45 90 top
C26  .1uf  [C0402]  83.57,182.37 180 top
C27  .1uf  [C0402]  84.33,178.82 270 top
C28  .1uf  [C0402]  82.8,203.45 180 top
C29  .1uf  [C0402]  80.01,202.95 90 top
C30  .1uf  [C0402]  79.5,197.87 270 top
C31  .1uf  [C0402]  76.45,212.34 270 top
C32  .1uf  [C0402]  76.45,209.04 270 top
C33  .1uf  [C0402]  86.87,184.15 270 top
C34  .1uf  [C0402]  91.19,187.71 270 top
C35  .1uf  [C0402]  95.5,184.91 0 top
C36  .1uf  [C0402]  97.03,189.23 90 top
C37  .1uf  [C0402]  92.71,181.36 180 top
C38  .1uf  [C0402]  90.93,198.12 180 top
C39  .1uf  [C0402]  97.28,200.66 90 top
C40  .1uf  [C0402]  88.9,196.09 270 top
C41  .1uf  [C0402]  92.71,187.96 270 top
C42  .1uf  [C0402]  92.96,197.61 270 top
C43  .1uf  [C0402]  81.28,213.61 0 top
C44  .1uf  [C0402]  82.3,207.52 180 top
C45  .1uf  [C0402]  81.03,187.45 270 top
C46  .1uf  [C0402]  80.77,197.61 270 top
C47  .1uf  [C0402]  315.21,194.56 90 top
C48  .1uf  [C0402]  320.29,185.42 0 top
C49  .1uf  [C0402]  337.82,194.06 180 top
C50  .1uf  [C0402]  340.87,194.06 180 top
C51  .01uf  [C0201]  316.23,194.56 90 top
C52  .01uf  [C0201]  320.29,186.44 0 top
C53  .01uf  [C0201]  340.36,193.04 180 top
C54  .01uf  [C0201]  338.07,193.04 180 top
C55  .1uf  [C0402]  113.03,231.71 0 top
C56  .1uf  [C0402]  309.37,188.21 0 top
C57  .1uf  [C0402]  309.88,177.29 180 top
C58  .01uf  [C0201]  309.88,186.69 0 top
C59  .01uf  [C0201]  309.88,178.82 180 top
C60  .1uf  [C0402]  99.06,185.17 180 top
C61  .1uf  [C0402]  103.38,187.71 270 top
C62  .1uf  [C0402]  103.89,185.17 0 top
C63  .1uf  [C0402]  128.02,227.08 270 top
C64  .01uf  [C0402]  100.84,211.84 180 top
C65  .01uf  [C0402]  100.3,210.57 180 top
C66  .01uf  [C0201]  126.75,220.22 270 top
C67  .01uf  [C0201]  126.77,214.71 270 top
C68  .01uf  [C0201]  117.35,230.38 0 top
C69  .01uf  [C0201]  112.29,230.38 0 top
C70  .1uf  [C0402]  109.22,187.2 90 top
C71  .1uf  [C0402]  102.87,181.61 180 top
C72  .1uf  [C0402]  107.44,181.61 180 top
C73  .1uf  [C0402]  103.63,198.37 90 top
C74  .1uf  [C0402]  102.62,202.95 180 top
C75  .1uf  [C0402]  112.52,183.13 270 top
C76  .1uf  [C0402]  112.27,186.44 270 top
C77  .1uf  [C0402]  117.35,186.94 270 top
C78  .1uf  [C0402]  121.92,189.74 90 top
C79  .1uf  [C0402]  117.35,182.12 270 top
C80  .1uf  [C0402]  121.16,182.12 180 top
C81  .1uf  [C0402]  113.72,201.99 0 top
C82  .1uf  [C0402]  112.27,199.14 270 top
C83  .1uf  [C0402]  121.41,179.58 270 top
C84  .1uf  [C0402]  127.25,183.64 270 top
C85  .1uf  [C0402]  131.06,187.45 270 top
C86  .1uf  [C0402]  132.33,189.23 90 top
C87  .1uf  [C0402]  124.71,178.82 180 top
C88  .1uf  [C0402]  127.76,178.82 180 top
C89  .1uf  [C0402]  122.17,198.88 90 top
C90  .1uf  [C0402]  124.21,193.8 0 top
C91  .1uf  [C0402]  132.84,180.34 270 top
C92  .1uf  [C0402]  135.38,183.13 180 top
C93  .1uf  [C0402]  141.22,185.42 180 top
C94  .1uf  [C0402]  143.51,189.48 90 top
C95  .1uf  [C0402]  134.87,180.09 270 top
C96  .1uf  [C0402]  136.91,179.32 90 top
C97  .1uf  [C0402]  136.65,194.82 270 top
C98  .1uf  [C0402]  138.18,201.68 90 top
C99  .1uf  [C0402]  104.9,187.71 270 top
C100  .1uf  [C0402]  104.9,198.37 270 top
C101  .1uf  [C0402]  116.08,187.71 270 top
C102  .1uf  [C0402]  115.82,198.37 270 top
C103  .1uf  [C0402]  128.52,187.96 270 top
C104  .1uf  [C0402]  128.52,198.12 270 top
C105  .1uf  [C0402]  140.21,187.71 270 top
C106  .1uf  [C0402]  140.21,198.12 270 top
C107  .1uf  [C0603]  86.87,224.79 270 top
C108  1uf  [C1206]  89.15,224.54 270 top
C109  10uf  [SMC_B]  91.69,224.54 270 top
C110  .1uf  [C0603]  81.03,218.19 90 top
C111  1uf  [C1206]  78.74,218.19 90 top
C112  10uf  [SMC_B]  75.69,218.19 90 top
C113  .1uf  [C0402]  82.55,218.38 90 top
C114  1uf  [C1206]  87.63,233.17 90 top
C115  10uf  [SMC_B]  90.42,233.17 90 top
C116  .01uf  [C0201]  84.07,218.44 90 top
C117  .1uf  [C0402]  374.9,189.48 270 top
C118  .1uf  [C0402]  374.9,184.4 90 top
C119  .01uf  [C0201]  373.63,189.48 270 top
C120  .01uf  [C0201]  373.66,184.45 90 top
C121  .01uf  [C0201]  362.2,188.47 270 top
C122  .1uf  [C0402]  363.22,188.47 270 top
C123  .1uf  [C0402]  362.97,183.13 270 top
C124  .1uf  [C0603K]  216.15,167.89 180 top
C125  1uf  [C1206K]  216.92,165.61 180 top
C126  1uf  [C1206K]  211.84,165.61 0 top
C127  .1uf  [C0603K]  115.57,277.11 0 top
C128  .1uf  [C0603K]  119.32,255.45 180 top
C129  10uf  [C1206K]  115.06,279.65 0 top
C130  10uf  [C1206K]  119.83,253.67 180 top
C131  1uf  [C1206K]  202.69,176.78 180 top
C132  1uf  [C1206K]  226.31,176.53 0 top
C133  .1uf  [C0603K]  223.61,170.77 0 top
C134  .1uf  [C0603K]  128.46,255.7 180 top
C135  10uf  [C1206K]  127.7,253.16 180 top
C136  .1uf  [C0603K]  192.79,262.64 0 top
C137  1uf  [C1206K]  194.56,264.67 0 top
C138  1uf  [C1206K]  192.79,259.33 0 top
C139  1uf  [C1206K]  182.63,272.54 90 top
C140  1uf  [C1206K]  184.4,246.38 270 top
C141  .1uf  [C0603K]  189.23,252.73 0 top
C142  .1uf  [C0603K]  180.59,271.78 90 top
C143  .1uf  [C0603K]  172.97,269.24 180 top
C144  .1uf  [C0603K]  189.48,269.24 90 top
C145  .1uf  [C0603K]  172.72,252.73 180 top
C146  .1uf  [C0603K]  181.1,250.19 270 top
C147  .1uf  [C0603K]  42.11,30.23 270 top
C148  .1uf  [C0603K]  205.21,185.7 180 top
C149  .1uf  [C0603K]  205.49,171.2 180 top
C150  .1uf  [C0603K]  223.52,186.18 0 top
C151  .1uf  [C0603K]  202.69,179.58 180 top
C152  .1uf  [C0603K]  194.82,167.89 270 top
C153  10uf  [C1206K]  197.1,167.89 270 top
C154  .1uf  [C0603K]  225.53,179.02 0 top
C155  2200pf  [C0603K]  225.3,181.61 0 top
C156  .1uf  [C0603K]  157.99,175.77 270 top
C157  .1uf  [C0603K]  174.5,175.26 0 top
C158  22uf  [PANASONIC_D]  302.26,182.88 0 top
C159  1uf  [C1206K]  50.5,30.23 270 top
C160  10uf  [C1206K]  161.04,175.26 270 top
C161  10uf  [C1206K]  174.5,177.55 0 top
C162  1uf  [C1206K]  341.38,315.47 0 top
C163  1uf  [C1206K]  202.69,174.24 180 top
C164  .1uf  [C0603K]  340.36,312.42 270 top
C165  .1uf  [C0603K]  211.33,256.79 0 top
C166  .1uf  [C0603K]  153.92,287.27 180 top
C167  .1uf  [C0603K]  354.84,318.01 270 top
C168  10uf  [C1206K]  320.29,317.5 180 top
C169  1uf  [C1206K]  211.33,254.76 0 top
C170  1uf  [C1206K]  189.48,272.29 0 top
C171  [E5-10,5]  131.57,276.61 90 top
C172  .1uf  [C0603K]  62.43,30.23 270 top
C173  1uf  [C1206K]  70.82,30.23 270 top
C174  10uf  [SMC_B]  3.3,16.26 270 top
C175  1uf  [C1206]  11.68,16.51 90 top
C176  .1uf  [C0603K]  85.29,30.23 270 top
C177  1uf  [C1206K]  93.68,30.23 270 top
C178  .1uf  [C0603]  8.13,20.83 270 top
C179  .1uf  [C0603]  4.32,12.7 0 top
C180  .1uf  [C0603K]  108.15,30.23 270 top
C181  1uf  [C1206K]  116.54,30.23 270 top
C184  .1uf  [C0603K]  131.01,30.23 270 top
C185  1uf  [C1206K]  139.4,30.23 270 top
C188  .1uf  [C0603K]  156.41,30.23 270 top
C189  1uf  [C1206K]  164.8,30.23 270 top
C192  .1uf  [C0603K]  181.81,30.23 270 top
C193  1uf  [C1206K]  190.2,30.23 270 top
C196  .1uf  [C0603K]  207.21,30.23 270 top
C197  1uf  [C1206K]  215.6,30.23 270 top
C200  .1uf  [C0603K]  230.07,30.23 270 top
C201  1uf  [C1206K]  238.46,30.23 270 top
C204  .1uf  [C0603K]  252.93,30.23 270 top
C205  1uf  [C1206K]  261.32,30.23 270 top
D1  28V-5A  [DO-214AA]  116.59,283.97 0 top
D3  MBRS340T3  [SMC]  92.46,216.15 270 top
DGND  [1X01]  94.49,223.27 180 top
DGND1  [1X01]  85.09,234.44 0 top
DGND2  [1X01]  142.43,253.92 0 top
DGND3  [1X01]  165.61,173.99 0 top
DGND5  PINHD-1X1  [1X01']  351.28,181.86 180 top
HOUT1  [1X01]  44.65,29.21 0 top
HOUT3  [1X01]  64.97,29.21 0 top
HOUT5  [1X01]  87.83,29.21 0 top
HOUT7  [1X01]  110.69,29.21 0 top
HOUT9  [1X01]  133.55,29.21 0 top
HOUT11  [1X01]  158.95,29.21 0 top
HOUT13  [1X01]  184.35,29.21 0 top
HOUT15  [1X01]  209.75,29.21 0 top
HOUT17  [1X01]  232.61,29.21 0 top
HOUT19  [1X01]  255.47,29.21 0 top
IC1  OPA4344E  [TSSOP14]  92.71,192.79 0 top
IC2  LMV321M5  [SOT23-5]  8.64,16.76 180 top
IC3  STM32H743ZIT6  [QFP50P2200X2200X160-144N]  114.3,218.19 0 top
IC4  LMV321M5  [SOT23-5]  81.28,210.82 0 top
IC5  [78LXX]  319.53,193.29 0 top
IC6  [79LXX]  320.29,188.72 0 top
IC7  OPA4344E  [TSSOP14]  104.9,193.04 0 top
IC8  OPA4344E  [TSSOP14]  115.82,193.04 0 top
IC9  OPA4344E  [TSSOP14]  128.52,193.04 0 top
IC10  OPA4344E  [TSSOP14]  140.21,193.04 0 top
IC11  LP5912  [6-WSON]  85.6,219.2 90 top
IC12  REG1117  [SOT223]  81.53,225.04 90 top
IC13  REG1117  [SOT223]  119.83,261.29 0 top
IC14  REG1117  [SOT223]  130.5,261.29 0 top
IC15  REG1117  [SOT223]  349.5,319.02 90 top
IC16  OPA4344E  [TSSOP14]  309.63,182.63 180 top
IC17  OPA4344E  [TSSOP14]  81.03,192.53 0 top
IC18  REG1117  [SOT223]  189.48,168.91 90 top
IC20  REG1117  [SOT223]  173.48,169.93 180 top
J1  AUDIO_JACK_TRS_0.25"_PTH_RA  [AUDIO_JACK_0.25"_TRS_PTH_RA]  89.41,301.5 270 bottom
J2  4P-2.0  [HW4-2.0]  133.1,225.55 270 top
J3  4P-2.0  [HW4-2.0]  223.52,258.57 270 top
J4  4P-2.0  [HW4-2.0]  230.38,258.57 270 top
J5  4P-2.0  [HW4-2.0]  237.24,258.57 270 top
J6  4P-2.0  [HW4-2.0]  244.09,258.57 270 top
J7  4P-2.0  [HW4-2.0]  250.95,258.57 270 top
J8  4P-2.0  [HW4-2.0]  130.3,233.68 180 top
J9  4P-2.0-90D  [HW4-2.0-90D]  68.28,35.56 270 bottom
J10  4P-2.0  [HW4-2.0]  133.86,212.34 90 top
J11  4P-2.0  [HW4-2.0]  186.44,185.17 180 top
J12  4P-2.0  [HW4-2.0]  198.37,185.17 180 top
J13  4P-2.0  [HW4-2.0]  162.81,244.6 180 top
J14  4P-2.0  [HW4-2.0]  176.78,244.6 180 top
J15  4P-2.0  [HW4-2.0]  192.53,246.13 180 top
J16  4P-2.0  [HW4-2.0]  154.43,175.77 270 top
J17  4P-2.0  [HW4-2.0]  97.54,233.43 180 top
J18  4P-2.0  [HW4-2.0]  114.05,242.82 180 top
J19  4P-2.0  [HW4-2.0]  101.85,242.82 180 top
J20  4P-2.0  [HW4-2.0]  325.88,311.15 90 top
J21  4P-2.0  [HW4-2.0]  323.6,302.26 0 top
J22  4P-2.0  [HW4-2.0]  319.02,311.15 90 top
J23  4P-2.0  [HW4-2.0]  334.52,302.26 0 top
J24  4P-2.0  [HW4-2.0]  344.17,303.28 270 top
J25  4P-2.0-90D  [HW4-2.0-90D]  47.96,35.56 270 bottom
J26  4P-2.0  [HW4-2.0]  351.03,303.28 270 top
J27  4P-2.0-90D  [HW4-2.0-90D]  91.14,35.56 270 bottom
J28  PJ-066A  [CUI_PJ-066A]  114.05,287.53 90 bottom
J29  4P-2.0-90D  [HW4-2.0-90D]  114,35.56 270 bottom
J31  4P-2.0-90D  [HW4-2.0-90D]  136.86,35.56 270 bottom
J32  AUDIO_JACK_TRS_0.25"_PTH_RA  [AUDIO_JACK_0.25"_TRS_PTH_RA]  22.1,27.18 270 top
J33  4P-2.0-90D  [HW4-2.0-90D]  162.26,35.56 270 bottom
J34  4P-2.0  [HW4-2.0]  86.87,272.03 0 top
J35  4P-2.0-90D  [HW4-2.0-90D]  187.66,35.56 270 bottom
J36  4P-2.0  [HW4-2.0]  308.61,195.33 0 top
J37  4P-2.0-90D  [HW4-2.0-90D]  213.06,35.56 270 bottom
J38  4P-2.0  [HW4-2.0]  7.11,3.05 180 top
J39  4P-2.0-90D  [HW4-2.0-90D]  235.92,35.56 270 bottom
J41  4P-2.0-90D  [HW4-2.0-90D]  258.78,35.56 270 bottom
J42  J-20-100-2X10_M  [DIL-100-2X10_M]  234.7,177.04 270 bottom
JP1  PINHD-2X8  [2X08]  47.24,141.48 270 top
JP2  PINHD-2X8  [2X08]  98.81,177.55 0 top
JP3  PINHD-2X4  [2X04]  289.56,152.15 90 top
JP4  PINHD-2X4  [2X04]  370.59,152.4 90 top
JP5  PINHD-2X4  [2X04]  407.16,214.12 90 top
JP6  PINHD-2X10  [2X10]  355.6,152.15 90 top
JP7  PINHD-2X10  [2X10]  436.63,152.4 90 top
JP8  PINHD-2X10  [2X10]  473.2,214.12 90 top
JP9  [2X15]  331.44,130.51 0 top
JP10  [2X15]  412.45,130.78 0 top
JP11  [2X15]  449,192.51 0 top
JP12  PINHD-1X2  [1X02]  267.72,197.61 0 top
JP13  PINHD-1X2  [1X02]  267.72,186.18 0 top
JP14  PINHD-1X2  [1X02]  298.45,194.31 0 top
JP15  PINHD-2X8  [2X08]  390.14,183.39 0 top
JP16  PINHD-2X8  [2X08]  209.55,247.14 0 top
JP17  PINHD-1X2  [1X02]  267.72,139.19 0 top
JP18  PINHD-1X2  [1X02]  267.72,174.75 0 top
JP19  PINHD-1X8  [1X08]  133.1,289.56 0 bottom
JP20  PINHD-1X2  [1X02]  98.3,272.29 90 top
JP21  PINHD-1X4  [1X04]  220.79,354.33 0 bottom
LED1  RED  [CHIP-LED0603]  97.79,229.62 270 top
LED2  GREEN  [CHIP-LED0603]  109.73,234.7 90 top
LED3  RED  [CHIP-LED0603]  216.41,188.47 270 top
LED4  RED  [CHIP-LED0603]  169.42,249.17 90 top
LED5  [P-LCC-2]  193.55,332.49 90 bottom
LED6  [P-LCC-2]  154.18,330.2 0 bottom
LED7  [P-LCC-2]  150.37,341.12 0 bottom
LED8  [P-LCC-2]  135.38,334.77 90 bottom
LED9  [P-LCC-2]  118.87,342.65 90 bottom
LED10  [P-LCC-2]  100.33,347.73 90 bottom
LED11  [P-LCC-2]  80.26,346.46 90 bottom
LED12  [P-LCC-2]  214.04,362.15 0 bottom
OPT1_A  PINHD-1X1  [1X01']  82.04,175.51 0 top
OPT1_B  PINHD-1X1  [1X01']  86.87,191.26 0 top
OPT2_A  PINHD-1X1  [1X01']  82.04,178.05 0 top
OPT2_B  PINHD-1X1  [1X01']  76.71,190.25 0 top
OPT3_A  PINHD-1X1  [1X01']  87.38,181.36 0 top
OPT3_B  PINHD-1X1  [1X01']  98.55,191.77 0 top
OPT4_A  PINHD-1X1  [1X01']  89.92,181.36 0 top
OPT4_B  PINHD-1X1  [1X01']  86.87,188.72 0 top
OPT5_A  PINHD-1X1  [1X01']  97.54,181.86 0 top
OPT5_B  PINHD-1X1  [1X01']  109.22,189.99 0 top
OPT6_A  PINHD-1X1  [1X01']  100.08,181.86 0 top
OPT6_B  PINHD-1X1  [1X01']  100.84,190.5 0 top
OPT7_A  PINHD-1X1  [1X01']  114.55,176.28 0 top
OPT7_B  PINHD-1X1  [1X01']  120.14,190.25 0 top
OPT8_A  PINHD-1X1  [1X01']  117.09,176.28 0 top
OPT8_B  PINHD-1X1  [1X01']  112.01,193.04 0 top
OPT9_A  PINHD-1X1  [1X01']  121.67,176.28 0 top
OPT9_B  PINHD-1X1  [1X01']  132.59,195.07 0 top
OPT10_A  PINHD-1X1  [1X01']  124.21,176.28 0 top
OPT10_B  PINHD-1X1  [1X01']  124.71,196.85 0 top
OPT11_A  PINHD-1X1  [1X01']  129.79,176.28 0 top
OPT11_B  PINHD-1X1  [1X01']  143.76,199.9 0 top
OPT12_A  PINHD-1X1  [1X01']  132.59,176.28 0 top
OPT12_B  PINHD-1X1  [1X01']  135.64,200.15 0 top
P1  P-10-100-2X05_M  [DIL-100-2X05_M]  150.11,270.76 180 bottom
P2  P-24-100-2X12_M  [DIL-100-2X12_M]  197.16,279.81 180 bottom
P3  M-1X03-SIP-100-40Y  [SIP-100-03-40Y]  88.9,248.92 90 top
P4  M-1X03-SIP-100-40Y  [SIP-100-03-40Y]  89.15,260.86 90 top
P5_2  [1X01]  194.31,180.59 180 top
P5_3  [1X01]  191.77,180.59 180 top
PA0  PINHD-1X1  [1X01']  86.87,193.8 0 top
PA1  PINHD-1X1  [1X01']  76.96,195.83 0 top
PA2  PINHD-1X1  [1X01']  98.55,194.31 0 top
PA3  PINHD-1X1  [1X01']  86.87,196.34 0 top
PA4  PINHD-1X1  [1X01']  108.97,195.58 0 top
PA5  PINHD-1X1  [1X01']  100.84,196.6 0 top
PA6  PINHD-1X1  [1X01']  120.14,195.83 0 top
PA7  PINHD-1X1  [1X01']  110.49,199.14 0 top
PB0  PINHD-1X1  [1X01']  132.08,204.22 0 top
PB1  PINHD-1X1  [1X01']  134.37,202.69 0 top
PC4  PINHD-1X1  [1X01']  132.08,200.91 0 top
PC5  PINHD-1X1  [1X01']  124.71,198.88 0 top
PGO1  [1X01]  45.67,41.91 0 top
PGO3  [1X01]  65.99,41.91 0 top
PGO5  [1X01]  88.85,41.91 0 top
PGO7  [1X01]  111.71,41.91 0 top
PGO9  [1X01]  134.57,41.91 0 top
PGO11  [1X01]  159.97,41.91 0 top
PGO13  [1X01]  185.37,41.91 0 top
PGO15  [1X01]  210.77,41.91 0 top
PGO17  [1X01]  233.63,41.91 0 top
PGO19  [1X01]  256.49,41.91 0 top
Q1  25MHz  [NX3225]  99.06,216.15 180 top
R1  10k  [RESC1608X60]  57.66,222.76 180 bottom
R2  100R  [RESC1608X60]  54.1,215.9 0 bottom
R3  10k  [RESC1608X60]  57.66,214.38 180 bottom
R4  47R  [R0603]  100.08,208.79 180 top
R5  10k  [R0402]  108.46,232.41 90 top
R6  100R  [RESC1608X60]  54.1,207.01 0 bottom
R7  10k  [RESC1608X60]  57.66,205.99 180 bottom
R8  100R  [RESC1608X60]  54.1,198.63 0 bottom
R9  560R  [R0603]  405.89,204.47 90 top
R10  560R  [R0603]  298.45,188.21 90 top
R11  47k  [R0603]  301.5,188.72 180 top
R12  10k  [RESC1608X60]  57.66,197.36 180 bottom
R13  560R  [R0603]  363.73,148.59 0 top
R14  0R_DNP  [R0603]  329.18,180.85 270 top
R15  0R_DNP  [R0603]  331.98,180.85 270 top
R16  100R  [RESC1608X60]  54.1,189.23 0 bottom
R17  10k  [RESC1608X60]  57.91,188.47 180 bottom
R18  100R  [RESC1608X60]  53.85,180.59 0 bottom
R19  10k  [RESC1608X60]  57.66,179.83 180 bottom
R20  100R  [RESC1608X60]  53.59,171.96 0 bottom
R21  10k  [RESC1608X60]  57.66,171.2 180 bottom
R22  100R  [RESC1608X60]  53.59,163.32 0 bottom
R23  10k  [RESC1608X60]  57.4,127.25 180 bottom
R24  100R  [RESC1608X60]  51.56,121.67 0 bottom
R25  10k  [RESC1608X60]  57.4,162.31 180 bottom
R26  100R  [RESC1608X60]  54.1,154.18 0 bottom
R27  10k  [RESC1608X60]  57.4,153.67 180 bottom
R28  100R  [RESC1608X60]  54.1,145.54 0 bottom
R29  10k  [RESC1608X60]  57.66,144.78 180 bottom
R30  100R  [RESC1608X60]  55.12,137.67 0 bottom
R31  10k  [RESC1608X60]  57.4,135.89 180 bottom
R32  100R  [RESC1608X60]  54.1,128.02 0 bottom
R33  20k  [R0603]  80.26,182.12 180 top
R34  20k  [R0603]  78.99,187.45 90 top
R35  820R  [R0603]  81.28,184.15 180 top
R36  820R  [R0603]  84.07,185.93 90 top
R37  0R  [R0603]  84.58,192.79 270 top
R38  20k  [R0603]  82.3,197.87 270 top
R39  20k  [R0603]  82.8,201.93 0 top
R40  820R  [R0603]  84.58,197.87 270 top
R41  820R  [R0603]  78.99,200.41 0 top
R42  0R  [R0603]  77.22,193.04 270 top
R43  100k  [R0603]  78.49,212.34 90 top
R44  100k  [R0603]  78.49,208.79 90 top
R45  20k  [R0603]  89.15,184.91 0 top
R46  20k  [R0603]  94.49,183.13 180 top
R47  820R  [R0603]  89.41,187.71 90 top
R48  820R  [R0603]  95.25,187.96 270 top
R49  0R  [R0603]  96.27,192.79 270 top
R50  20k  [R0603]  90.42,200.15 0 top
R51  20k  [R0603]  94.49,201.17 180 top
R52  820R  [R0603]  95,198.12 270 top
R53  820R  [R0603]  97.54,197.36 270 top
R54  0R  [R0603]  89.15,192.79 270 top
R55  20k  [R0603]  101.85,187.71 90 top
R56  20k  [R0603]  106.68,187.45 90 top
R57  820R  [R0603]  99.57,187.71 90 top
R58  820R  [R0603]  103.38,183.13 0 top
R59  0R  [R0603]  108.46,192.79 270 top
R60  20k  [R0603]  107.95,183.13 0 top
R61  20k  [R0603]  106.68,198.37 270 top
R62  33R  [R0201]  100.84,227.08 0 top
R63  820R  [R0603]  104.39,201.42 0 top
R64  820R  [R0603]  101.85,199.14 90 top
R65  0R  [R0603]  101.09,193.55 270 top
R66  20k  [R0603]  115.06,183.39 0 top
R67  20k  [R0603]  114.3,186.44 90 top
R68  820R  [R0603]  119.89,185.93 180 top
R69  820R  [R0603]  119.63,187.96 0 top
R70  0R  [R0603]  119.38,193.04 270 top
R71  20k  [R0603]  121.16,183.9 0 top
R72  20k  [R0603]  117.6,198.63 270 top
R73  820R  [R0603]  119.89,198.63 270 top
R74  820R  [R0603]  114.05,198.37 90 top
R75  0R  [R0603]  111.76,195.83 270 top
R76  20k  [R0603]  124.71,180.85 0 top
R77  20k  [R0603]  130.56,183.9 180 top
R78  820R  [R0603]  125.22,187.71 90 top
R79  560R  [R0603]  110.49,231.9 90 top
R80  820R  [R0603]  125.22,184.4 90 top
R81  33R  [R0201]  100.84,225.04 0 top
R82  0R  [R0603]  97.28,225.81 180 top
R83  33R  [R0201]  100.84,226.06 0 top
R84  33R  [R0201]  100.84,224.03 0 top
R85  0R  [R0603]  132.59,197.87 270 top
R86  0R_DNP  [R0603]  97.28,223.77 180 top
R87  0R_DNP  [R0603]  97.28,227.84 180 top
R88  20k  [R0603]  129.79,181.1 0 top
R89  20k  [R0603]  130.3,198.37 270 top
R90  820R  [R0603]  124.21,192.02 0 top
R91  820R  [R0603]  122.43,195.83 270 top
R92  0R  [R0603]  126.75,198.12 270 top
R93  20k  [R0603]  135.38,185.17 0 top
R94  20k  [R0603]  138.43,187.71 90 top
R95  820R  [R0603]  138.43,183.9 90 top
R96  820R  [R0603]  141.48,182.88 0 top
R97  0R  [R0603]  143.76,202.69 270 top
R98  20k  [R0603]  139.45,179.83 0 top
R99  20k  [R0603]  134.87,192.53 270 top
R100  820R  [R0603]  141.92,198.56 270 top
R101  820R  [R0603]  138.43,198.63 90 top
R102  0R  [R0603]  137.16,204.22 0 top
R103  0R  [R0603]  88.14,218.95 270 top
R104  560R  [R0603]  93.73,229.62 0 top
R105  33R  [R0402]  113.54,234.19 90 top
R106  33R  [R0402]  114.81,234.19 90 top
R107  33R  [R0402]  117.35,233.43 270 top
R108  0R_DNP  [R0603]  98.55,221.74 180 top
R109  33R  [R0402]  116.08,233.43 90 top
R110  0R  [R0603]  326.9,180.85 270 top
R111  0R  [R0603]  334.26,180.85 270 top
R112  0R  [R0603]  333.25,178.31 180 top
R113  10k  [R0603]  222.76,168.4 270 top
R114  10k  [R0603]  226.57,171.7 270 top
R115  10k  [R0603]  207.26,168.4 0 top
R116  0R  [R0603]  188.21,176.02 180 top
R117  33R  [R0201]  207.52,188.47 0 top
R118  33R  [R0201]  207.52,187.45 0 top
R119  33R  [R0201]  204.72,183.39 0 top
R120  10k  [R0603]  207.52,166.12 180 top
R121  33R  [R0201]  204.72,182.37 0 top
R122  33R  [R0201]  204.72,181.71 0 top
R123  560R  [R0603]  213.61,188.47 0 top
R124  33R  [R0201]  204.85,180.47 0 top
R125  1k  [R0603]  335.31,315.47 180 top
R126  2k  [R0603]  48.72,43.18 0 top
R127  2k  [R0603]  48.72,40.39 180 top
R128  560R  [R0603]  187.71,326.64 270 bottom
R129  560R  [R0603]  153.67,324.36 0 bottom
R130  0R  [R0603]  135.32,267.64 90 top
R131  2k  [R0603]  49.73,37.85 270 top
R132  0R_DNP  [R0603]  42.88,41.91 180 top
R133  0R  [R0603]  325.63,319.79 0 top
R134  1k  [R0603]  330.71,315.47 0 top
R135  560R  [R0603]  146.56,337.31 270 bottom
R136  560R  [R0603]  132.08,338.58 0 bottom
R137  560R  [R0603]  115.82,346.71 0 bottom
R138  560R  [R0603]  172.47,249.17 180 top
R139  560R  [R0603]  97.03,351.28 0 bottom
R140  560R  [R0603]  77.72,350.52 90 bottom
R141  560R  [R0603]  218.28,357.04 180 bottom
R142  1.5k  [R0603]  214.12,278.13 0 top
R143  0R  [R0603]  198.88,355.35 0 bottom
R144  0R  [R0603]  198.88,350.27 0 bottom
R145  0R_DNP  [R0603]  198.88,347.47 180 bottom
R146  0R_DNP  [R0603]  198.88,352.81 180 bottom
R147  1.5k  [R0603]  214.12,280.92 0 top
R148  1.5k  [R0603]  157.73,276.61 180 top
R149  1.5k  [R0603]  157.23,279.65 270 top
R150  1.5k  [R0603]  346.2,315.72 180 top
R151  1.5k  [R0603]  354.58,306.83 270 top
R152  1.5k  [R0603]  159,285.5 90 top
R153  1.5k  [R0603]  161.29,282.19 0 top
R154  1.5k  [R0603]  147.83,285.24 180 top
R155  1.5k  [R0603]  147.07,287.78 180 top
R156  1.5k  [R0603]  126.75,285.24 90 top
R157  1.5k  [R0603]  126.75,281.69 90 top
R158  1k  [R0603]  217.93,258.32 270 top
R159  1k  [R0603]  312.42,187.2 0 top
R160  1k  [R0603]  311.91,189.74 270 top
R161  1k  [R0603]  313.94,189.74 270 top
R162  1k  [R0603]  315.98,189.74 270 top
R163  2k  [R0603]  69.04,43.18 0 top
R164  2k  [R0603]  69.04,40.39 180 top
R165  2k  [R0603]  70.05,37.85 270 top
R166  0R_DNP  [R0603]  63.2,41.91 180 top
R167  1k  [R0603]  306.58,189.48 270 top
R168  1k  [R0603]  304.55,189.48 270 top
R169  1k  [R0603]  306.07,186.94 180 top
R170  1k  [R0603]  311.4,175.26 90 top
R171  2k  [R0603]  91.9,43.18 0 top
R172  2k  [R0603]  91.9,40.39 180 top
R173  2k  [R0603]  92.91,37.85 270 top
R174  0R_DNP  [R0603]  86.06,41.91 180 top
R175  1k  [R0603]  313.69,175.26 90 top
R176  1k  [R0603]  312.93,178.05 0 top
R177  1k  [R0603]  307.59,175.26 90 top
R178  1k  [R0603]  305.31,175.26 90 top
R179  2k  [R0603]  114.76,43.18 0 top
R180  2k  [R0603]  114.76,40.39 180 top
R181  2k  [R0603]  115.77,37.85 270 top
R182  0R_DNP  [R0603]  108.92,41.91 180 top
R183  1k  [R0603]  306.58,178.05 180 top
R184  560R  [R0603]  288.29,142.75 90 top
R185  0R  [R0603]  327.41,175.26 180 top
R186  2k  [R0603]  9.6,12.39 270 top
R187  2k  [R0603]  137.62,43.18 0 top
R188  2k  [R0603]  137.62,40.39 180 top
R189  2k  [R0603]  138.63,37.85 270 top
R190  0R_DNP  [R0603]  131.78,41.91 180 top
R191  2k  [R0603]  9.19,8.77 180 top
R192  10k  [R0603]  5.84,20.83 270 top
R193  10k  [R0603]  5.84,17.02 90 top
R194  10k  [R0603]  10.41,20.83 90 top
R195  2k  [R0603]  163.02,43.18 0 top
R196  2k  [R0603]  163.02,40.39 180 top
R197  2k  [R0603]  164.03,37.85 270 top
R198  0R_DNP  [R0603]  157.18,41.91 180 top
R199  10k  [R0603]  6.35,23.62 0 top
R203  2k  [R0603]  188.42,43.18 0 top
R204  2k  [R0603]  188.42,40.39 180 top
R205  2k  [R0603]  189.43,37.85 270 top
R206  0R_DNP  [R0603]  182.58,41.91 180 top
R211  2k  [R0603]  213.82,43.18 0 top
R212  2k  [R0603]  213.82,40.39 180 top
R213  2k  [R0603]  214.83,37.85 270 top
R214  0R_DNP  [R0603]  207.98,41.91 180 top
R219  2k  [R0603]  236.68,43.18 0 top
R220  2k  [R0603]  236.68,40.39 180 top
R221  2k  [R0603]  237.69,37.85 270 top
R222  0R_DNP  [R0603]  230.84,41.91 180 top
R227  2k  [R0603]  259.54,43.18 0 top
R228  2k  [R0603]  259.54,40.39 180 top
R229  2k  [R0603]  260.55,37.85 270 top
R230  0R_DNP  [R0603]  253.7,41.91 180 top
S1  MOMENTARY-SWITCH-SPST-PTH-6.0MM  [TACTILE_SWITCH_PTH_6.0MM]  135.15,327.84 0 bottom
S2  MOMENTARY-SWITCH-SPST-PTH-6.0MM  [TACTILE_SWITCH_PTH_6.0MM]  118.97,335.81 0 bottom
S3  MOMENTARY-SWITCH-SPST-PTH-6.0MM  [TACTILE_SWITCH_PTH_6.0MM]  100.53,340.84 0 bottom
S4  MOMENTARY-SWITCH-SPST-PTH-6.0MM  [TACTILE_SWITCH_PTH_6.0MM]  80.24,339.9 0 bottom
S5  MOMENTARY-SWITCH-SPST-PTH-6.0MM  [TACTILE_SWITCH_PTH_6.0MM]  185.65,353.31 0 bottom
S6  MOMENTARY-SWITCH-SPST-PTH-6.0MM  [TACTILE_SWITCH_PTH_6.0MM]  185.93,338.48 0 bottom
S7  MOMENTARY-SWITCH-SPST-PTH-6.0MM  [TACTILE_SWITCH_PTH_6.0MM]  180.19,345.82 0 bottom
S8  MOMENTARY-SWITCH-SPST-PTH-6.0MM  [TACTILE_SWITCH_PTH_6.0MM]  191.08,345.87 0 bottom
S9  MOMENTARY-SWITCH-SPST-PTH-6.0MM  [TACTILE_SWITCH_PTH_6.0MM]  193.65,326.52 0 bottom
S10  MOMENTARY-SWITCH-SPST-PTH-6.0MM  [TACTILE_SWITCH_PTH_6.0MM]  161.21,330 0 bottom
S11  MOMENTARY-SWITCH-SPST-PTH-6.0MM  [TACTILE_SWITCH_PTH_6.0MM]  157.25,341.15 0 bottom
S12  MOMENTARY-SWITCH-SPST-PTH-6.0MM  [TACTILE_SWITCH_PTH_6.0MM]  221.76,361.97 0 bottom
SW1  PEC11R-4215F-S0024  [PEC11R-4215F-S0024]  165.35,360.68 0 bottom
U1  CY8C5868AXI-LP035  [TQFP-100-14X14MM]  214.63,178.56 270 top
U2  CY8C5868AXI-LP035  [TQFP-100-14X14MM]  181.1,261.11 0 top
U3  [QRE1113]  55.88,219.46 90 bottom
U4  [QRE1113]  55.88,210.82 90 bottom
U5  [QRE1113]  55.88,202.18 90 bottom
U6  [QRE1113]  55.88,193.29 90 bottom
U7  [QRE1113]  55.88,184.66 90 bottom
U8  [QRE1113]  55.88,175.77 90 bottom
U9  [QRE1113]  55.88,167.13 90 bottom
U10  [QRE1113]  55.88,158.24 90 bottom
U11  [QRE1113]  55.88,149.61 90 bottom
U12  [QRE1113]  55.88,140.97 90 bottom
U13  [QRE1113]  55.63,132.08 90 bottom
U14  [QRE1113]  55.63,123.44 90 bottom
U15  R-78E5.0-1.0  [DC-DC_CONVERTER_78XX]  117.09,274.57 180 top
U16  TEXAS_TPS2051B  [TEXAS_SOT23-5]  51.31,131.32 0 bottom
U17  R-78E5.0-1.0  [DC-DC_CONVERTER_78XX]  370.59,186.69 90 top
U18  R-78E5.0-1.0  [DC-DC_CONVERTER_78XX]  359.66,186.44 90 top
U19  TCA9548APWR  [SOP65P640X120-24N]  212.6,261.87 180 top
U20  TCA9548APWR  [SOP65P640X120-24N]  335.53,310.13 0 top
U22  AS5600  [SOIC8-1.27-5X4MM]  43.89,35.81 0 top
U23  AS5600  [SOIC8-1.27-5X4MM]  64.21,35.81 0 top
U25  AS5600  [SOIC8-1.27-5X4MM]  87.07,35.81 0 top
U27  AS5600  [SOIC8-1.27-5X4MM]  109.93,35.81 0 top
U29  AS5600  [SOIC8-1.27-5X4MM]  132.79,35.81 0 top
U31  AS5600  [SOIC8-1.27-5X4MM]  158.19,35.81 0 top
U33  AS5600  [SOIC8-1.27-5X4MM]  183.59,35.81 0 top
U35  AS5600  [SOIC8-1.27-5X4MM]  208.99,35.81 0 top
U37  AS5600  [SOIC8-1.27-5X4MM]  231.85,35.81 0 top
U39  AS5600  [SOIC8-1.27-5X4MM]  254.71,35.81 0 top
U$1  RK09  [RK09]  122.68,360.43 0 bottom
U$2  RK09  [RK09]  85.6,360.93 0 bottom
U$3  CMR0512S3C  [CMR0512S3C]  336.55,191.26 0 top
U$5  MCP3221  [SOT23-5L]  5.06,10.06 270 top
U$6  SS-7188VS-A-FLS  [SS-7188VS-A-FLS_RJ45]  336.04,325.37 180 bottom
U$9  P82B96DP,118  [SO8]  153.42,283.97 270 top
U$10  P82B96DP,118  [SO8]  350.01,312.17 270 top
VREGGND  PINHD-1X1  [1X01']  331.72,183.64 90 top
VREGIN  PINHD-1X1  [1X01']  329.18,183.64 90 top
X1  3221-10-0300-00  [3221-10-0300-00]  153.67,257.3 270 top
X2  3221-10-0300-00  [3221-10-0300-00]  141.48,220.98 90 top
X3  3221-10-0300-00  [3221-10-0300-00]  165.61,185.93 180 top
X4  GLX-S-88M  [GLX-S-88M]  154.43,296.93 0 bottom
X5  2524-  [PAK100/2500-24]  192.28,361.77 0 top
X6  2520-  [PAK100/2500-20]  249.43,177.04 270 top
X8  2510-  [PAK100/2500-10]  145.24,352.72 0 top

## Library data of the parts
3V3A 3V3A_1 3V3A_2 3V3D 3V3D1 3V3D2 5V 5VD1 5VD2 AGND AGND_1 AGND_2 DGND DGND1-DGND3 HOUT1 HOUT3 HOUT5 HOUT7 HOUT9 HOUT11 HOUT13 HOUT15 HOUT17 HOUT19 P5_2 P5_3 PGO1 PGO3 PGO5 PGO7 PGO9 PGO11 PGO13 PGO15 PGO17 PGO19 = adafruit; PARTNO: *DNP
5V/1 DGND5 JP1-JP8 JP12-JP21 OPT1_A OPT1_B OPT2_A OPT2_B OPT3_A OPT3_B OPT4_A OPT4_B OPT5_A OPT5_B OPT6_A OPT6_B OPT7_A OPT7_B OPT8_A OPT8_B OPT9_A OPT9_B OPT10_A OPT10_B OPT11_A OPT11_B OPT12_A OPT12_B PA0 PA1-PA7 PB0 PB1 PC4 PC5 VREGGND VREGIN = Connector; CATEGORY: CONNECTOR; SUB-CATEGORY: PIN-HEADER
C1-C5 C11-C15 C20 C22-C50 C55-C57 C60-C63 C70-C106 C113 C117 C118 C122 C123 = rcl; PARTNO: CC0402KRX7R8BB104; SPICEPREFIX: C
C6-C10 C51-C54 C58 C59 C66-C69 C116 C119-C121 = rcl; PARTNO: TMK063B7103KP-F; SPICEPREFIX: C
C16 C21 C64 C65 = rcl; PARTNO: CC0402KRX7R8BB103; SPICEPREFIX: C
C17 C18 = rcl; PARTNO: CL10C180JB8NNNC; SPICEPREFIX: C
C19 = adafruit; PARTNO: T491A225K020AT
C107 C110 C178 C179 = rcl; PARTNO: CC0603KRX7R8BB104; SPICEPREFIX: C
C108 C111 C114 C175 = rcl; PARTNO: C3216X7R1E105K085AA; SPICEPREFIX: C
C109 C112 C115 C174 = rcl; PARTNO: TAJB106K025RNJ; SPICEPREFIX: C
C124 C127 C128 C133 C134 C136 C141-C152 C154 C156 C157 C164-C167 C172 C176 C180 C184 C188 C192 C196 C200 C204 = adafruit; PARTNO: CC0603KRX7R8BB104
C125 C126 C131 C132 C137-C140 C159 C162 C163 C169 C170 C173 C177 C181 C185 C189 C193 C197 C201 C205 = adafruit; PARTNO: C3216X7R1E105K085AA
C129 C130 C135 C153 C160 C161 C168 = rcl; PARTNO: TMK316F106ZL-T
C155 = adafruit; PARTNO: C0603C222J5GACTU
C158 = adafruit; PARTNO: EEE-1CA220NP
C171 LED5-LED12 = adafruit
D1 = OPL_Discrete_Semiconductor; MPN: SS54B
D3 = diode; PARTNO: MBRS340T3G
IC1 IC2 IC4 IC7-IC10 IC16 IC17 = linear
IC3 = STM32H743ZIT6; AVAILABILITY: Unavailable; DESCRIPTION: High-performance and DSP with DP-FPU, ARM Cortex-M7 MCU with 2MBytes Flash, 1MB RAM, 400 MHz CPU, Art Accelerator, L1...; MF: STMicroelectronics; MP: STM32H743ZIT6; PACKAGE: LQFP-144 STMicroelectronics; PARTNO: STM32H743ZIT6; PRICE: None
IC5 IC6 = v-reg
IC11 = custom; PARTNO: LP5912-3.3DRVT
IC12 = custom; PARTNO: LM1117IMPX-3.3/NOPB
IC13-IC15 IC18 IC20 = custom; PARTNO: LD1117S33TR
J1 J32 = SparkFun-Connectors; PROD_ID: CONN-12339; SF_ID: COM-11144
J2-J27 J29 J31 J33-J39 J41 = OPL_Connector
J28 = PJ-066A; MANUFACTURER: CUI INC; PARTREV: 1.02; STANDARD: Manufacturer recommendations
J42 P1-P4 = con-headers-jp
JP9-JP11 = pinhead
LED1 LED3 LED4 = adafruit; PARTNO: 5973006507F
LED2 = adafruit; PARTNO: 5973506507F
Q1 = adafruit; PARTNO: 7M-25.000MAAJ-T
R1-R3 R6-R8 R12 R16-R32 = Resistor; CATEGORY: Resistor; SUB-CATEGORY: Fixed
R4 R113-R116 R120 R126 R127 R130-R132 R143-R146 R163-R166 R171-R174 R179-R182 R186-R191 R195-R198 R203-R206 R211-R214 R219-R222 R227-R230 = Resistor; PARTNO: ESR03EZPJ470
R5 = Resistor; PARTNO: RC0402FR-0710KL
R9 R10 R13 R33-R61 R63-R80 R85 R88-R102 R104 R123 R125 R128 R129 R133-R142 R147-R162 R167-R170 R175-R178 R183 R184 R192-R194 R199 = Resistor; PARTNO: ESR03EZPF5600
R11 = Resistor; PARTNO: ESR03EZPJ473
R14 R15 R82 R86 R87 R103 R108 R110-R112 R185 = Resistor; PARTNO: RCS06030000Z0EA
R62 R81 R83 R84 R117-R119 R121 R122 R124 = rcl; PARTNO: RC0201FR-0733RL; SPICEPREFIX: R
R105-R107 R109 = Resistor; PARTNO: RC0402FR-0733RL
S1-S12 = SparkFun-Switches; PROD_ID: SWCH-08441; SF_SKU: COM-00097
SW1 = Switch; CREATED_BY: PCBLayout.com; DIGIKEY_PART_NUMBER: PEC11R-4215F-S0024-ND; MANUFACTURER: Bourns Inc.; MPN: PEC11R-4215F-S0024
U1 U2 = SparkFun-IC-Microcontroller; PROD_ID: IC-12190
U3-U14 = SparkFun-Sensors; PROD_ID: IC-09357; SF_ID: COM-09542
U15 U17 U18 = SparkFun-IC-Power; PROD_ID: COM-13655
U16 = LinkedLibrary52101
U19 U20 = TCA9548APWR; AVAILABILITY: Good; DESCRIPTION: Low-Voltage 8-Channel I2C Switch With Reset 24-TSSOP -40 to 85; MF: Texas Instruments; MP: TCA9548APWR; PACKAGE: TSSOP-24 Texas Instruments; PRICE: None; PURCHASE-URL: https://pricing.snapeda.com/search/part/TCA9548APWR/?ref=eda
U22 U23 U25 U27 U29 U31 U33 U35 U37 U39 = Sensor
U$1-U$3 U$5 U$6 = custom
U$9 U$10 = custom; PARTNO: P82B96TD*112
X1-X3 = custom; PARTNO: 4048
X4 = con-kycon; OC_FARNELL: unknown; OC_NEWARK: unknown
X5 X6 = con-3m; OC_FARNELL: unknown; OC_NEWARK: unknown
X8 = con-3m; MF: 3M; MPN: 2510-6002UB; OC_FARNELL: 9838244; OC_NEWARK: 46F4725